# Altium PCB Base.PcbDoc
Units mm, origin at the board's own origin, x right, y up, seen from the top; angles counter-clockwise.
Board outline 79.4 x 68 mm, 4 copper layers (Top Layer, Plane 1, Plane 2, Bottom Layer), stack 1.579 mm thick; 95 components, 41 nets, 267 pads, 201 vias.
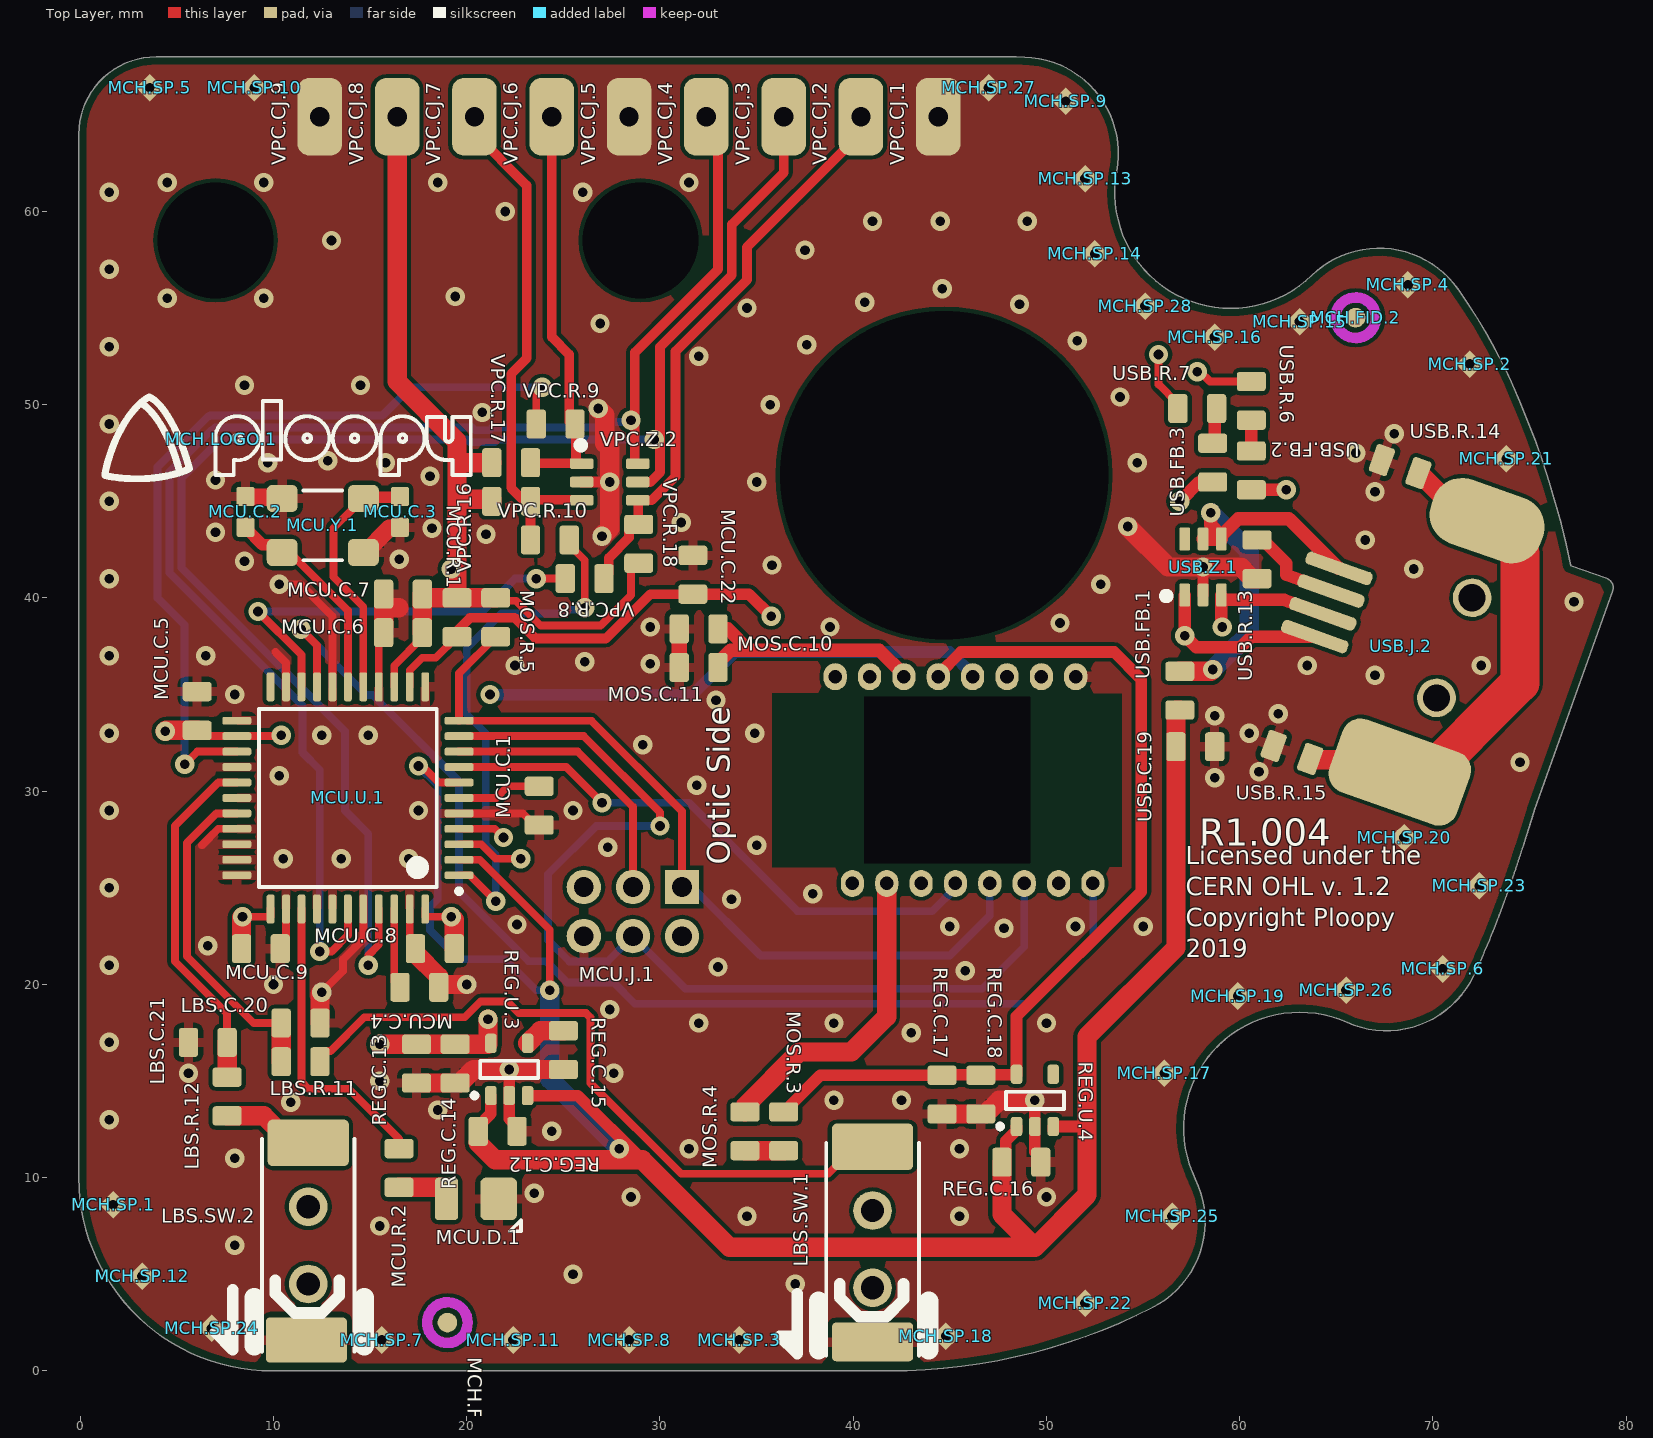
[diagram p0: Top Layer view]
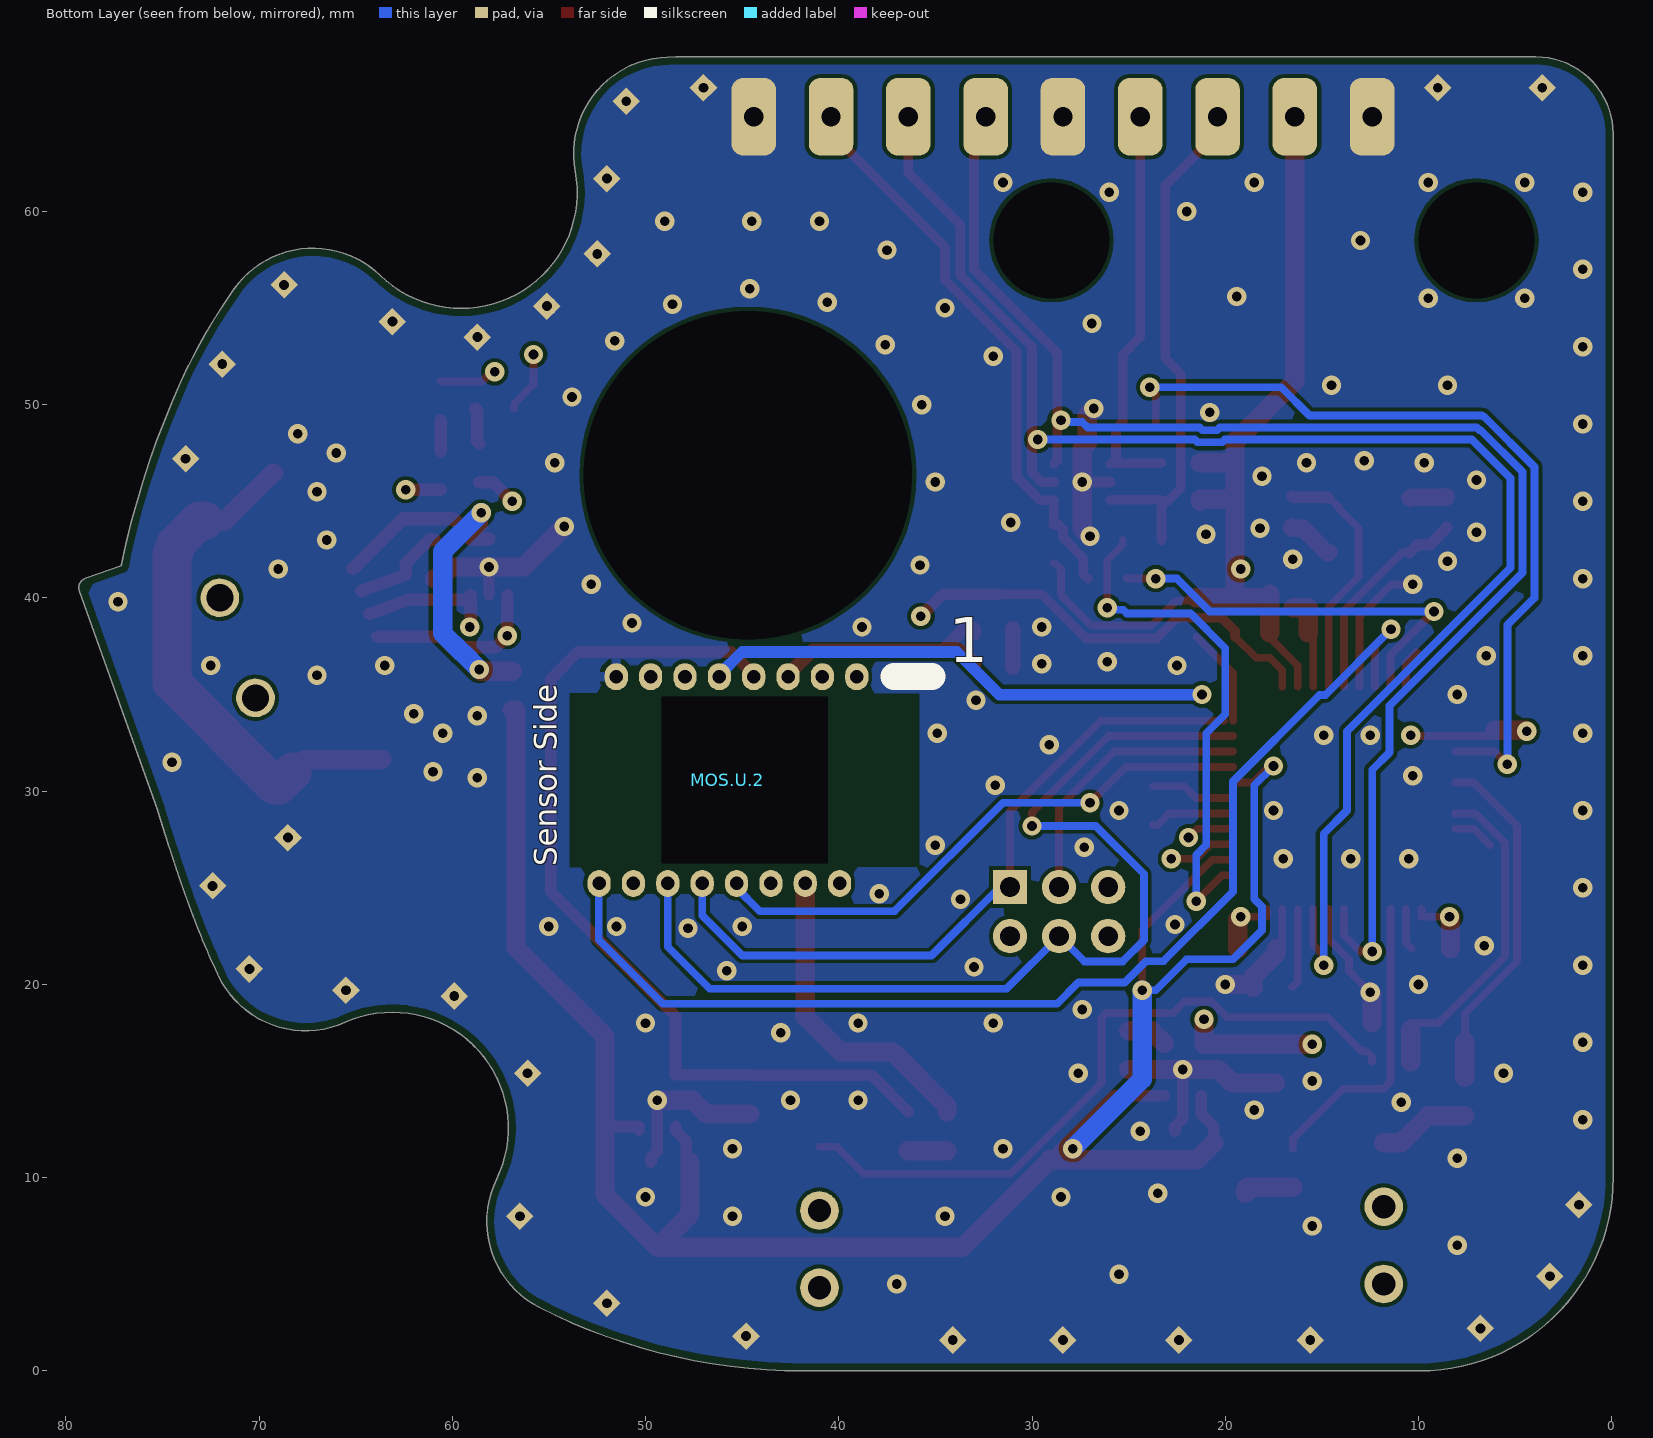
[diagram p1: Bottom Layer view, seen from below]
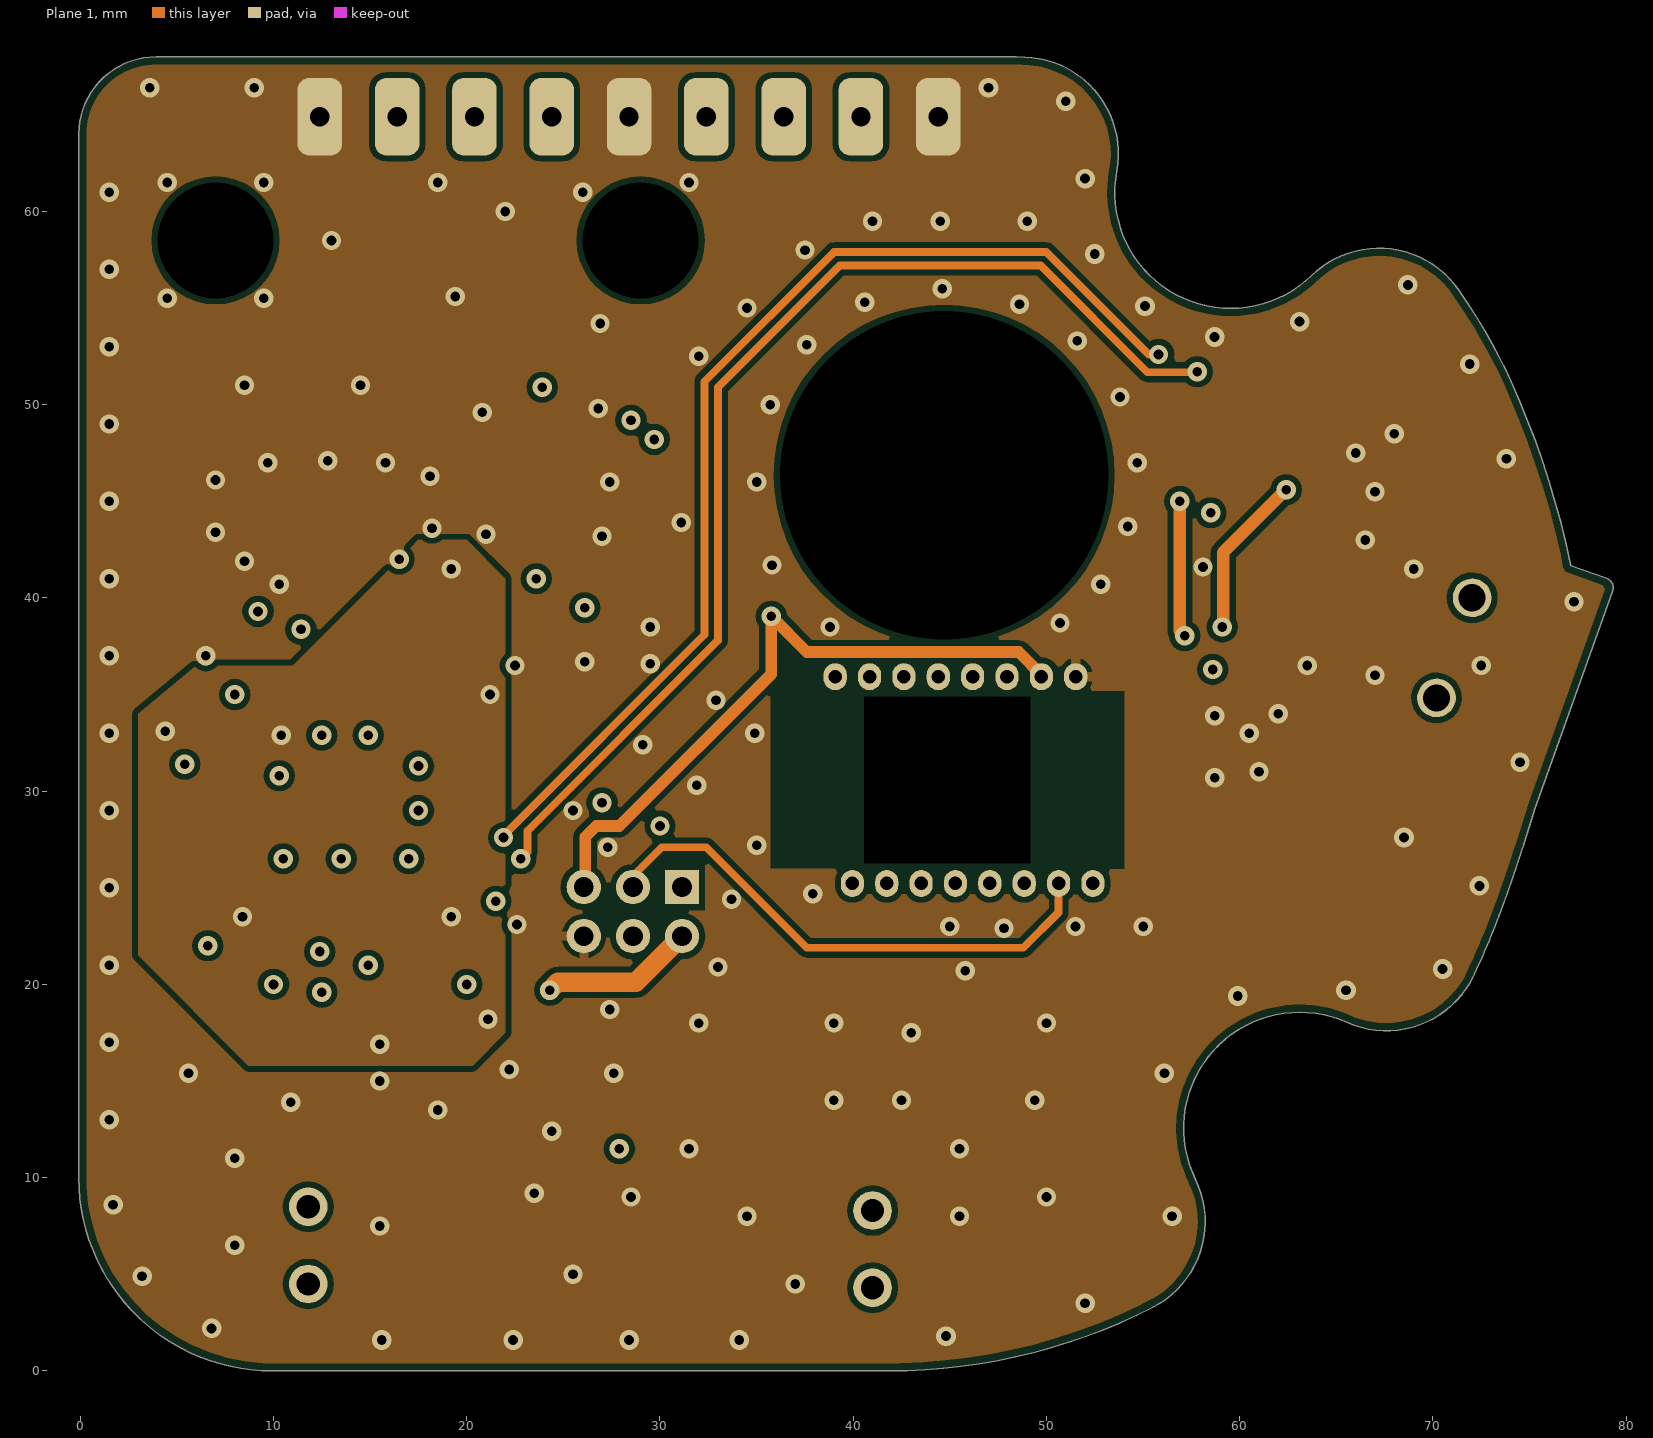
[diagram p2: Plane 1]
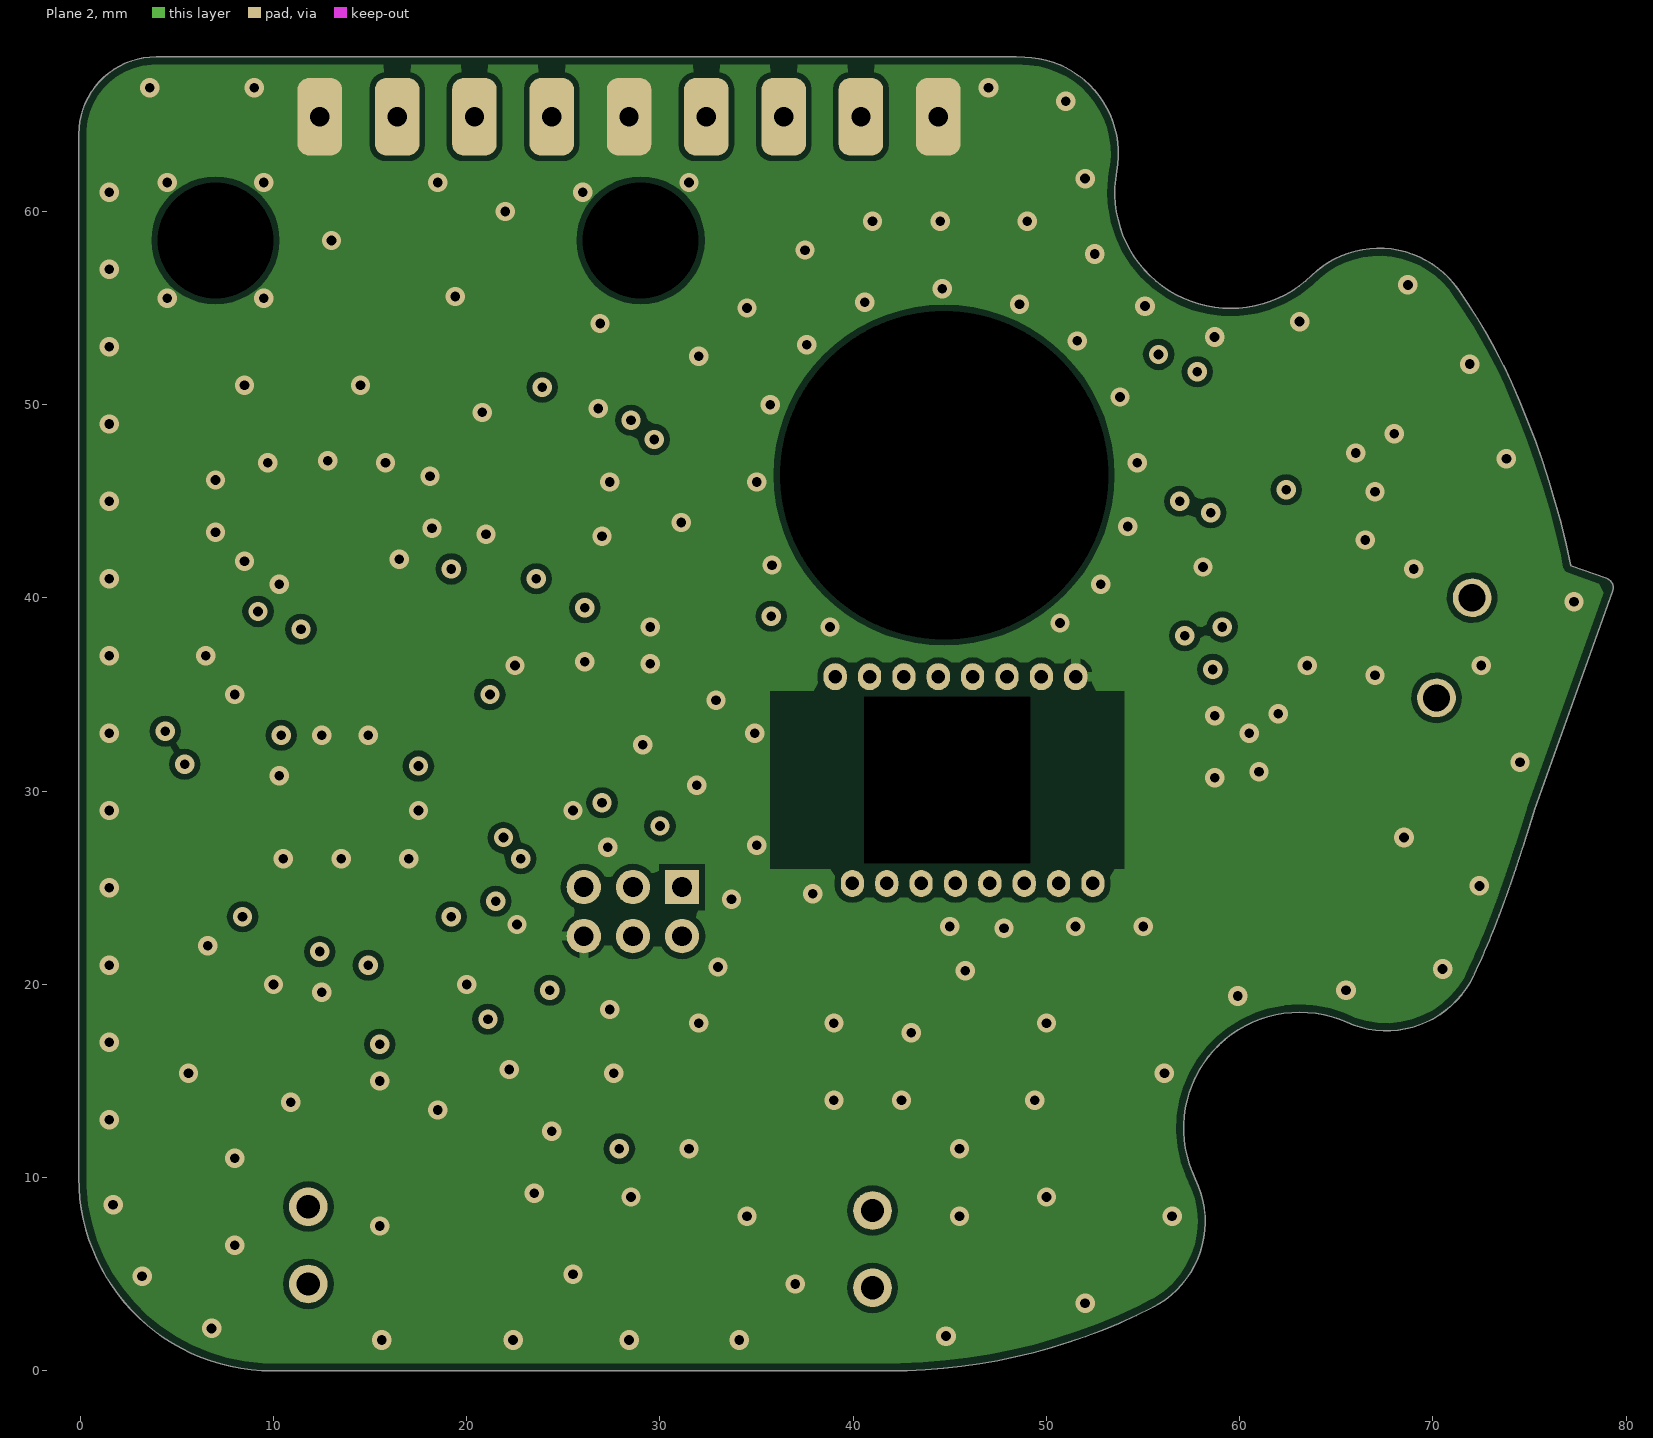
[diagram p3: Plane 2]

## Layer stack, top to bottom
Top Mask: solder mask 0.01, Solder Resist, Dk 3.5
Top Layer: signal copper 0.0356
Dielectric 1: prepreg 0.127, FR-4, Dk 4.2
Plane 1: signal copper 0.036
Dielectric 4: core 1.182, Dk 4.2
Plane 2: signal copper 0.036
Dielectric 2: prepreg 0.127, Dk 4.2
Bottom Layer: signal copper 0.0356
Bottom Solder: solder mask 0.01, Solder Resist, Dk 3.5

## Board outline
364 vertices, not listed, extent -0.073,0 79.324,68

## Design rules (kind name [scope] priority, off if disabled: settings)
BoardOutlineClearance [(Not HasFootprint('SPARKGAP'))] p1: gap=0.4 ignorepadtopadclearanceinfootprint=FALSE
Clearance "HighV Pads" [(InNetClass('HighV') AND (IsPad OR IsVia)) vs IsPad OR IsVia] p1: gap=0.4 ignorepadtopadclearanceinfootprint=FALSE except(0: Arc-Hole Track-Hole SMDPad-Hole THPad-Hole Via-Hole Fill-Hole Poly-Hole Region-Hole Text-Hole) // Establishes minimum clearance between bare pads that are high voltage, per IPC2221A Table 6-1, 51-100V, condition A6
Clearance Inter-Pad [IsPad vs IsPad] p2: gap=0.2 ignorepadtopadclearanceinfootprint=FALSE except(0: Arc-Hole Track-Hole SMDPad-Hole THPad-Hole Via-Hole Fill-Hole Poly-Hole Region-Hole Text-Hole)
Clearance "Spark Gaps" [InNetClass('Spark Gap') vs InNet('GND') And InPoly] p3: gap=0.635 ignorepadtopadclearanceinfootprint=FALSE except(0: Arc-Hole Track-Hole SMDPad-Hole THPad-Hole Via-Hole Fill-Hole Poly-Hole Region-Hole Text-Hole)
Clearance FIDs [Name like 'FID*'] p4: gap=1.016 ignorepadtopadclearanceinfootprint=FALSE except(0: Arc-Hole Track-Hole SMDPad-Hole THPad-Hole Via-Hole Fill-Hole Poly-Hole Region-Hole Text-Hole)
Clearance "Inner Planes" [InPoly AND OnMid] p5: gap=0.3 ignorepadtopadclearanceinfootprint=FALSE except(0: Arc-Hole Track-Hole SMDPad-Hole THPad-Hole Via-Hole Fill-Hole Poly-Hole Region-Hole Text-Hole) // Defines a larger clearance for planes on inner layers.
Clearance "All Planes" [InPoly] p6: gap=0.2 ignorepadtopadclearanceinfootprint=FALSE except(0: Arc-Hole Track-Hole SMDPad-Hole THPad-Hole Via-Hole Fill-Hole Poly-Hole Region-Hole Text-Hole) // Defines minimum clearance between planes on the same layer.
Clearance "Inner Layer Clearance" [OnMid vs OnMid] p7: gap=0.3 ignorepadtopadclearanceinfootprint=FALSE except(0: Arc-Hole Track-Hole SMDPad-Hole THPad-Hole Via-Hole Fill-Hole Poly-Hole Region-Hole Text-Hole) // We will give inner layers more spacing because they tend to be subject to stricter process limits.
Clearance [All] p8: gap=0.22 ignorepadtopadclearanceinfootprint=FALSE except(0: Arc-Hole Track-Hole SMDPad-Hole THPad-Hole Via-Hole Fill-Hole Poly-Hole Region-Hole Text-Hole) // 2 oz (70um) boards require at least 10mil spacing. We give a bit more to make sure things work well.
ComponentClearance "Terminal Block" [(HasFootprint('Phoenix 1933189 - Header')) vs (HasFootprint('Phoenix 1933189 - Header'))] p1: gap=-2.286 collisioncheckmode=3 verticalgap=0.254 showdistances=FALSE
ComponentClearance "FET/TP self Clearance" [(Name like 'Q*') Or (Name like 'TP*') vs (Name like 'Q*') Or (Name like 'TP*')] p2: gap=0.254 collisioncheckmode=3 verticalgap=0.254 showdistances=FALSE
ComponentClearance [Not ((Name like 'H*') Or (Name like 'FID*') Or (Name like 'SP*')) vs Not ((Name like 'H*') Or (Name like 'FID*') Or (Name like 'SP*'))] p3: gap=0.5 collisioncheckmode=3 verticalgap=0.5 showdistances=FALSE
DiffPairsRouting [All] p1: maxlimit=0.508 minlimit=0.279 mostfreqgap=0.381 toplayer_prefgap=0.279 toplayer_minwidth=0.279 toplayer_maxwidth=0.508 toplayer_prefwidth=0.381 midlayer2_mingap=0.305 midlayer2_minwidth=0.305 midlayer2_maxwidth=0.508 midlayer2_prefwidth=0.381 midlayer3_prefgap=0.279 midlayer3_minwidth=0.279 midlayer3_maxwidth=0.508 midlayer3_prefwidth=0.381 bottomlayer_prefgap=0.279 bottomlayer_minwidth=0.279 bottomlayer_maxwidth=0.508 bottomlayer_prefwidth=0.381 maxuncoupledlength=12.7
Height [All] p1: minheight=0 maxheight=41 prefheight=12.7
HoleSize [All] p1: absolutevalues=TRUE maxlimit=100 minlimit=0.3 maxpercent=80.000 minpercent=20.000
HoleToHoleClearance [All] p1: gap=0.6 allowstackedmicrovias=TRUE
LayerPairs [All] p1: enforce=FALSE
MinimumSolderMaskSliver [All] p1: minsoldermaskwidth=0.09
NetAntennae [Not (HasFootprint('BALANCE_RESISTOR'))] p1: netantennaetolerance=0
PasteMaskExpansion [All] p1: expansion=-0.025
PlaneClearance [All] p1: clearance=0.3
PlaneConnect [All] p1: pad.planeconnectstyle=Relief pad.reliefexpansion=0.5 pad.reliefentries=4 pad.reliefconductorwidth=0.5 pad.reliefairgap=0.25 via.planeconnectstyle=Direct via.reliefexpansion=0.5 via.reliefentries=4 via.reliefconductorwidth=0.5 via.reliefairgap=0.25
PolygonConnect "PolygonConnect Spark Gap" [HasFootprint('SparkGap')] p1: connectstyle=Direct reliefconductorwidth=0.254 reliefentries=4 polygonreliefangle="90 Angle" airgapwidth=0.254 // This rule makes it so spark gaps get direct connections to ground planes.
PolygonConnect PolygonConnect_GND [All vs InNet('GND')] p2: thpad.connectstyle=Relief thpad.reliefconductorwidth=0.5 thpad.reliefentries=4 thpad.polygonreliefangle="90 Angle" thpad.airgapwidth=0.25 smdpad.connectstyle=Relief smdpad.reliefconductorwidth=0.5 smdpad.reliefentries=4 smdpad.polygonreliefangle="90 Angle" smdpad.airgapwidth=0.25 via.connectstyle=Direct via.reliefconductorwidth=0.5 via.reliefentries=4 via.polygonreliefangle="90 Angle" via.airgapwidth=0.25 // This rule specifies all vias and holes connected to a GND plane have direct connections.
PolygonConnect [All] p3: thpad.connectstyle=Relief thpad.reliefconductorwidth=0.5 thpad.reliefentries=4 thpad.polygonreliefangle="90 Angle" thpad.airgapwidth=0.25 smdpad.connectstyle=Relief smdpad.reliefconductorwidth=0.5 smdpad.reliefentries=4 smdpad.polygonreliefangle="90 Angle" smdpad.airgapwidth=0.25 via.connectstyle=Direct via.reliefconductorwidth=0.5 via.reliefentries=4 via.polygonreliefangle="90 Angle" via.airgapwidth=0.25
RoutingVias [All] p1: holewidth=0.5 width=1 viastyle="Through Hole" minholewidth=0.2 minwidth=0.5 maxholewidth=5.08 maxwidth=6.35
ShortCircuit [Not (InPadClass('TraceResistorPads')) vs Not (InPadClass('TraceResistorPads'))] p1: allowed=FALSE
SilkToBoardRegionClearance [All] p1 off:
SilkToSilkClearance [All] p1 off: silktosilkclearance=0.254
SilkToSolderMaskClearance SilkscreenOverComponentPads [IsPad] p1: minsilkscreentomaskgap=0.102 clearancetoexposedcopper=FALSE
SolderMaskExpansion [All] p1: expansion=0.076
Width [All] p1: maxlimit=50.8 minlimit=0.26 preferedwidth=0.4 midlayer2_minwidth=0.35 midlayer3_minwidth=0.35 minimp=50.000000 maximp=50.000000 favimp=50.000000
15 further rules are at their usual default settings.

## Classes and differential pairs
component class VPC: VPC.CJ.1 VPC.CJ.2 VPC.CJ.3 VPC.CJ.4 VPC.CJ.5 VPC.CJ.6 VPC.CJ.7 VPC.CJ.8 VPC.CJ.9 VPC.R.8 VPC.R.9 VPC.R.10 VPC.R.16 VPC.R.17 VPC.R.18 VPC.Z.2
component class USB: USB.C.19 USB.FB.1 USB.FB.2 USB.FB.3 USB.J.2 USB.R.6 USB.R.7 USB.R.13 USB.R.14 USB.R.15 USB.Z.1
component class REG: REG.C.12 REG.C.13 REG.C.14 REG.C.15 REG.C.16 REG.C.17 REG.C.18 REG.U.3 REG.U.4
component class MOS: MOS.C.10 MOS.C.11 MOS.R.3 MOS.R.4 MOS.R.5 MOS.U.2
component class MCU: MCU.C.1 MCU.C.2 MCU.C.3 MCU.C.4 MCU.C.5 MCU.C.6 MCU.C.7 MCU.C.8 MCU.C.9 MCU.C.22 MCU.D.1 MCU.J.1 MCU.R.1 MCU.R.2 MCU.U.1 MCU.Y.1
component class LBS: LBS.C.20 LBS.C.21 LBS.R.11 LBS.R.12 LBS.SW.1 LBS.SW.2
component class MCH: MCH.FID.1 MCH.FID.2 MCH.LOGO.1 MCH.SP.1 MCH.SP.2 MCH.SP.3 MCH.SP.4 MCH.SP.5 MCH.SP.6 MCH.SP.7 MCH.SP.8 MCH.SP.9 MCH.SP.10 MCH.SP.11 MCH.SP.12 MCH.SP.13 MCH.SP.14 MCH.SP.15 MCH.SP.16 MCH.SP.17 MCH.SP.18 MCH.SP.19 MCH.SP.20 MCH.SP.21 MCH.SP.22 MCH.SP.23 MCH.SP.24 MCH.SP.25 MCH.SP.26 MCH.SP.27 MCH.SP.28

## Components (designator, comment, footprint, x,y, rotation, side; value= is the part's Value field where it differs from the comment)
LBS.C.20 "0805" 0805 11.4,18 r270 top value="0.01uF 100V" (schematic designator C20)
LBS.C.21 "0805" 0805 6.6,17 r90 top value="0.01uF 100V" (schematic designator C21)
LBS.R.11 "0805" 0805 11.4,16 r270 top value="1k 1%" (schematic designator R11)
LBS.R.12 "0805" 0805 7.6,14.2 r180 top value="1k 1%" (schematic designator R12)
LBS.SW.1 "D2LS-21" D2LS-21#1 41,6.3 r90 top (schematic designator SW1)
LBS.SW.2 "D2LS-21" D2LS-21#2 11.8,6.5 r90 top (schematic designator SW2)
MCH.FID.1 "IPC-7351 Fiducial 1mm" FIDUCIAL_1.5 19,2.5 r0 top (schematic designator FID1)
MCH.FID.2 "IPC-7351 Fiducial 1mm" FIDUCIAL_1.5 66,54.5 r0 top (schematic designator FID2)
MCH.LOGO.1 "Ploopy logo, silkscreen" PloopyLogo 7.3,48.2 r0 top (schematic designator LOGO1)
MCH.SP.1 "Spark Gap" SparkGap 1.7,8.6 r90 top (schematic designator SP1)
MCH.SP.2 "Spark Gap" SparkGap 71.9,52.1 r90 top (schematic designator SP2)
MCH.SP.3 "Spark Gap" SparkGap 34.1,1.6 r90 top (schematic designator SP3)
MCH.SP.4 "Spark Gap" SparkGap 68.7,56.2 r90 top (schematic designator SP4)
MCH.SP.5 "Spark Gap" SparkGap 3.6,66.4 r90 top (schematic designator SP5)
MCH.SP.6 "Spark Gap" SparkGap 70.5,20.8 r90 top (schematic designator SP6)
MCH.SP.7 "Spark Gap" SparkGap 15.6,1.6 r90 top (schematic designator SP7)
MCH.SP.8 "Spark Gap" SparkGap 28.4,1.6 r90 top (schematic designator SP8)
MCH.SP.9 "Spark Gap" SparkGap 51,65.7 r90 top (schematic designator SP9)
MCH.SP.10 "Spark Gap" SparkGap 9,66.4 r90 top (schematic designator SP10)
MCH.SP.11 "Spark Gap" SparkGap 22.4,1.6 r90 top (schematic designator SP11)
MCH.SP.12 "Spark Gap" SparkGap 3.2,4.9 r90 top (schematic designator SP12)
MCH.SP.13 "Spark Gap" SparkGap 52,61.7 r90 top (schematic designator SP13)
MCH.SP.14 "Spark Gap" SparkGap 52.5,57.8 r90 top (schematic designator SP14)
MCH.SP.15 "Spark Gap" SparkGap 63.1,54.3 r90 top (schematic designator SP15)
MCH.SP.16 "Spark Gap" SparkGap 58.7,53.5 r90 top (schematic designator SP16)
MCH.SP.17 "Spark Gap" SparkGap 56.1,15.4 r90 top (schematic designator SP17)
MCH.SP.18 "Spark Gap" SparkGap 44.8,1.8 r90 top (schematic designator SP18)
MCH.SP.19 "Spark Gap" SparkGap 59.9,19.4 r90 top (schematic designator SP19)
MCH.SP.20 "Spark Gap" SparkGap 68.5,27.6 r90 top (schematic designator SP20)
MCH.SP.21 "Spark Gap" SparkGap 73.8,47.2 r90 top (schematic designator SP21)
MCH.SP.22 "Spark Gap" SparkGap 52,3.5 r90 top (schematic designator SP22)
MCH.SP.23 "Spark Gap" SparkGap 72.4,25.1 r90 top (schematic designator SP23)
MCH.SP.24 "Spark Gap" SparkGap 6.8,2.2 r90 top (schematic designator SP24)
MCH.SP.25 "Spark Gap" SparkGap 56.5,8 r90 top (schematic designator SP25)
MCH.SP.26 "Spark Gap" SparkGap 65.5,19.7 r90 top (schematic designator SP26)
MCH.SP.27 "Spark Gap" SparkGap 47,66.4 r90 top (schematic designator SP27)
MCH.SP.28 "Spark Gap" SparkGap 55.1,55.1 r90 top (schematic designator SP28)
MCU.C.1 "0805" 0805 23.75,29.25 r180 top value="1uF 25V" (schematic designator C1)
MCU.C.2 "0603" 0603 8.55,44.45 r180 top value="18pF 50V" (schematic designator C2)
MCU.C.3 "0603" 0603 16.55,44.45 r0 top value="18pF 50V" (schematic designator C3)
MCU.C.4 "0805" 0805 17.55,19.85 r270 top value="0.1uF 100V" (schematic designator C4)
MCU.C.5 "0805" 0805 6.05,34.15 r0 top value="0.1uF 100V" (schematic designator C5)
MCU.C.6 "0805" 0805 16.7,38.2 r90 top value="0.1uF 100V" (schematic designator C6)
MCU.C.7 "0805" 0805 16.7,40.2 r90 top value="10uF 25V" (schematic designator C7)
MCU.C.8 "0805" 0805 18.35,21.85 r90 top value="0.1uF 100V" (schematic designator C8)
MCU.C.9 "0805" 0805 9.35,21.85 r270 top value="0.1uF 100V" (schematic designator C9)
MCU.C.22 "0805" 0805 31.7,41.2 r0 top value="0.1uF 100V" (schematic designator C22)
MCU.D.1 "SPMWH1228" SPMWH1228 20.5,8.9 r0 top (schematic designator D1)
MCU.J.1 "Atmel_ICSP" 6x2 31.14,25.04 r270 top (schematic designator J1)
MCU.R.1 "0805" 0805 19.5,39 r180 top value="10k 1%" (schematic designator R1)
MCU.R.2 "0805" 0805 16.5,10.5 r180 top value="1k 1%" (schematic designator R2)
MCU.U.1 "ATMEGA32U4RC-AU" "ATmega32U4 - TQFP80P1200X1200X120-44N" 13.85,29.65 r180 top locked (schematic designator U1)
MCU.Y.1 "LFXTAL055663BULK" LFXTAL055663BULK 12.55,43.75 r180 top (schematic designator Y1)
MOS.C.10 "0805" 0805 32,38.4 r90 top value="10uF 25V" (schematic designator C10)
MOS.C.11 "0805" 0805 32,36.4 r90 top value="0.1uF 100V" (schematic designator C11)
MOS.R.3 "0805" 0805 36.4,12.4 r180 top value="22R 1%" (schematic designator R3)
MOS.R.4 "0805" 0805 34.4,12.4 r0 top value="22R 1%" (schematic designator R4)
MOS.R.5 "0805" 0805 21.5,39 r180 top value="10k 1%" (schematic designator R5)
MOS.U.2 "PMW3360DM-T2QU" PMW3360DM-T2QU 39.067,35.925 r180 bottom locked (schematic designator U2)
REG.C.12 "0805" 0805 21.6,12.4 r270 top value="1uF 25V" (schematic designator C12)
REG.C.13 "0805" 0805 17.4,15.9 r180 top value="10uF 25V" (schematic designator C13)
REG.C.14 "0805" 0805 19.4,15.9 r180 top value="1uF 25V" (schematic designator C14)
REG.C.15 "0805" 0805 25,16.6 r180 top value="100pF 100V" (schematic designator C15)
REG.C.16 "0805" 0805 48.7,10.8 r270 top locked value="1uF 25V" (schematic designator C16)
REG.C.17 "0805" 0805 44.6,14.3 r180 top value="10uF 25V" (schematic designator C17)
REG.C.18 "0805" 0805 46.6,14.3 r180 top value="1uF 25V" (schematic designator C18)
REG.U.3 "AP2202K-3.3" "AP2202 - SOT95P270X145-5N" 22.2,15.6 r90 top (schematic designator U3)
REG.U.4 "AP2204K-1.8" "AP2202 - SOT95P270X145-5N" 49.4,14 r90 top (schematic designator U4)
USB.C.19 "0805" 0805 57.7,32.3 r270 top value="10uF 25V" (schematic designator C19)
USB.FB.1 "ACML-0805-601-T" 0805 56.9,35.2 r0 top (schematic designator FB1)
USB.FB.2 "ACML-0805-601-T" 0805 60.6,46.6 r180 top (schematic designator FB2)
USB.FB.3 "ACML-0805-601-T" 0805 58.6,47 r180 top (schematic designator FB3)
USB.J.2 "1734346-4" 1734346-4 71.575,37.25 r340.4 top locked (schematic designator J2)
USB.R.6 "0805" 0805 60.6,50.2 r180 top value="22R 1%" (schematic designator R6)
USB.R.7 "0805" 0805 57.8,49.8 r270 top value="22R 1%" (schematic designator R7)
USB.R.13 "0805" 0805 60.9,42 r180 top value=0R (schematic designator R13)
USB.R.14 "0805" 0805 68.3,46.8 r70.4 top value=0R (schematic designator R14)
USB.R.15 "0805" 0805 62.7,32 r70.4 top value=0R (schematic designator R15)
USB.Z.1 "IP4220CZ6,125" "PESD3V3S4UD - SOT95P275X110-6N" 58.1,41.6 r90 top (schematic designator Z1)
VPC.CJ.1 "PCBJointCastellationJoint" PCBJoint 44.4,64.9 r0 top (schematic designator CJ1)
VPC.CJ.2 "PCBJointCastellationJoint" PCBJoint 40.4,64.9 r0 top (schematic designator CJ2)
VPC.CJ.3 "PCBJointCastellationJoint" PCBJoint 36.4,64.9 r0 top (schematic designator CJ3)
VPC.CJ.4 "PCBJointCastellationJoint" PCBJoint 32.4,64.9 r0 top (schematic designator CJ4)
VPC.CJ.5 "PCBJointCastellationJoint" PCBJoint 28.4,64.9 r0 top (schematic designator CJ5)
VPC.CJ.6 "PCBJointCastellationJoint" PCBJoint 24.4,64.9 r0 top (schematic designator CJ6)
VPC.CJ.7 "PCBJointCastellationJoint" PCBJoint 20.4,64.9 r0 top (schematic designator CJ7)
VPC.CJ.8 "PCBJointCastellationJoint" PCBJoint 16.4,64.9 r0 top (schematic designator CJ8)
VPC.CJ.9 "PCBJointCastellationJoint" PCBJoint 12.4,64.9 r0 top (schematic designator CJ9)
VPC.R.8 "0805" 0805 26.1,41 r270 top value="10k 1%" (schematic designator R8)
VPC.R.9 "0805" 0805 24.6,49 r270 top value="10k 1%" (schematic designator R9)
VPC.R.10 "0805" 0805 24.3,43 r90 top value="10k 1%" (schematic designator R10)
VPC.R.16 "0805" 0805 22.3,45 r270 top value="1k 1%" (schematic designator R16)
VPC.R.17 "0805" 0805 22.3,47 r270 top value="1k 1%" (schematic designator R17)
VPC.R.18 "0805" 0805 28.9,42.8 r0 top value="1k 1%" (schematic designator R18)
VPC.Z.2 "IP4220CZ6,125" "PESD3V3S4UD - SOT95P275X110-6N" 27.4,46 r0 top (schematic designator Z2)

## Footprints (in the part's own frame and the unit in brackets; to place one, negate y for a bottom-side part, rotate by r counter-clockwise, add the part's x,y. Pads: shape width x height; smd on the part's side, far side on the other; paste and mask are expansions set on the pad)
6x2 [mil]
  rect 70x70 hole 40 paste-3897.64: 1(0,0)
  round 70 hole 40 paste-3897.64: 2(100,0) 3(0,-100) 4(100,-100) 5(0,-200) 6(100,-200)
  body extent -50,-250 150,50, height 330
0603 [mm] "Chip Capacitor, 2-Leads, Body 1.6x0.8mm, IPC Medium Density"
  rrect30% 0.95x1 smd paste-2.515: 1(0,-0.8) 2(0,0.8)
  body extent -0.48,-0.88 0.48,0.87, height 0.65
0805 [mm] "Chip Capacitor, 2-Leads, Body 2.0x1.3mm, IPC Medium Density"
  rrect30% 1.5x1 smd paste-2.515: 1(0,1.002) 2(0,-1.002)
  body extent -0.72,-1.1 0.72,1.1, height 0.8
1734346-4 [mm]
  rrect70% 3.6x0.7 smd paste-0.08 mask+0.092: 1(-7.5,1.875) 2(-7.5,-0.625) 3(-7.5,-1.875) 4(-7.5,0.625)
  rrect90% 6x3.5 smd paste-0.4: 5(-1.11,6.77)
  rrect50% 7x4 smd paste-0.4: 5(-1,-7)
  round 2 hole 1.4 paste-99: ""(-0.5,2.75) ""(-0.5,-2.75)
  body extent -8.6,-8.25 8.5,8.25, height 11.31
"AP2202 - SOT95P270X145-5N" [mm] "SOT23, 5-Leads, Body 2.92x2.70mm, Pitch 0.95mm, IPC Medium Density"
  rrect50% 1x0.6 smd paste-0.025: 1(-1.35,0.95) 2(-1.35,0) 3(-1.35,-0.95) 4(1.35,-0.95) 5(1.35,0.95)
  silkscreen extent -1.47,-1.5 0.45,1.92, body extent -0.85,-1.52 0.85,1.52, height 1.45
"ATmega32U4 - TQFP80P1200X1200X120-44N" [mm] "TQFP, 44-Leads, Body 10.00x10.00mm, Pitch 0.80mm, IPC Medium Density"
  rrect50% 1.5x0.4 smd paste-0.05: 1(-5.75,4) 2(-5.75,3.2) 3(-5.75,2.4) 4(-5.75,1.6) 5(-5.75,0.8) 6(-5.75,0) 7(-5.75,-0.8) 8(-5.75,-1.6) 9(-5.75,-2.4) 10(-5.75,-3.2) 11(-5.75,-4) 23(5.75,-4) 24(5.75,-3.2) 25(5.75,-2.4) 26(5.75,-1.6) 27(5.75,-0.8) 28(5.75,0) 29(5.75,0.8) 30(5.75,1.6) 31(5.75,2.4) 32(5.75,3.2) 33(5.75,4)
  rrect50% 0.4x1.5 smd paste-0.05: 12(-4,-5.75) 13(-3.2,-5.75) 14(-2.4,-5.75) 15(-1.6,-5.75) 16(-0.8,-5.75) 17(0,-5.75) 18(0.8,-5.75) 19(1.6,-5.75) 20(2.4,-5.75) 21(3.2,-5.75) 22(4,-5.75) 34(4,5.75) 35(3.2,5.75) 36(2.4,5.75) 37(1.6,5.75) 38(0.8,5.75) 39(0,5.75) 40(-0.8,5.75) 41(-1.6,5.75) 42(-2.4,5.75) 43(-3.2,5.75) 44(-4,5.75)
  silkscreen extent -5.88,-4.6 4.6,4.95, body extent -5,-5 5,5, height 1.2
D2LS-21#1 [mm]
  rrect20% 2x4.2 smd paste-0.03: A(-4.8,0)
  rrect20% 2.4x4.2 smd paste-0.03: B(5.3,0)
  round 2 hole 1.2: ""(-2,0) ""(2,0)
  silkscreen extent -5.5,-2.9 5.5,4.8, body extent -5.6,-2.4 5.6,2.4, height 3.19
D2LS-21#2 [mm]
  rrect20% 2.35x4.2 smd paste-0.03: A(-4.9,0.1)
  rrect20% 2.4x4.2 smd paste-0.03: B(5.3,0)
  round 2 hole 1.2: ""(-2,0) ""(2,0)
  silkscreen extent -5.5,-2.9 5.5,4.8, body extent -5.6,-2.4 5.6,2.4, height 3.19
FIDUCIAL_1.5 [mil]
  round 40 smd paste-60 mask+30: 1(0,0)
  Top Layer keep-out circle w21.65: c0,0 r41.34
LFXTAL055663BULK [mm]
  rrect40% 1.6x1.4 smd paste-0.05: 1(-2.1,-1.4) 2(2.1,-1.4) 3(2.1,1.4) 4(-2.1,1.4)
  silkscreen extent -1,-1.8 1,1.8, body extent -2.5,-1.6 2.5,1.6, height 1
PCBJoint [mm]
  rrect50% 2.3x4 hole 1 paste-99: 1(0,0)
"PESD3V3S4UD - SOT95P275X110-6N" [mm] "SOT23, 6-Leads, Body 2.90x2.75mm, Pitch 0.95mm, IPC Medium Density"
  rrect30% 1.2x0.55 smd paste-0.026 mask+0.085: 1(-1.45,0.95) 2(-1.45,0) 3(-1.45,-0.95) 4(1.45,-0.95) 5(1.45,0) 6(1.45,0.95)
  silkscreen extent -1.62,1.77 -1.38,2.02, body extent -0.85,-1.55 0.85,1.55, height 1.1
PloopyLogo [mm]
  silkscreen extent -6.04,-2.03 12.9,2.2
PMW3360DM-T2QU [mm]
  oval 1.2x1.4 hole 0.7: 1(0,0) 2(-1.778,0) 3(-3.556,0) 4(-5.334,0) 5(-7.112,0) 6(-8.89,0) 7(-10.668,0) 8(-12.446,0) 9(-13.335,-10.7) 10(-11.557,-10.7) 11(-9.779,-10.7) 12(-8.001,-10.7) 13(-6.223,-10.7) 14(-4.445,-10.7) 15(-2.667,-10.7) 16(-0.889,-10.7)
  rect 0x0 hole 8.6 square unplated: ""(-5.8,-5.35)
  silkscreen extent 1.92,0 3.9,0, body extent -16.06,-14.76 5.09,4.09, height 2.44
SparkGap [mil]
  rect 40x40 smd rot 45 paste-99 mask+4: 1(0,0)
  rect 40x40 smd far side rot 45 paste-99 mask+4: 1(0,0)
SPMWH1228 [mm]
  rrect30% 1.2x2.2 smd paste-0.05 mask+0.02: 1(-1.55,0)
  rrect30% 1.9x2.2 smd paste-0.05 mask+0.02: 2(1.15,0)
  silkscreen extent 1.72,-1.67 2.3,-1.1, body extent -1.75,-1.4 1.75,1.4, height 0.65

## Part data
LBS.C.20 LBS.C.21: library part "Cap 0.01uF 100V", "0805, X5R or better", Supplier Part Number 1=1276-6845-2-ND, PNP-A=0, PNP-da=0, PNP-dx=0, PNP-dy=0, PNP-FeedType=Tape, PNP-Level=1, PNP-Lv=1, PNP-Nzl=2, PNP-PlacePriority=1, PNP-Pt=0, PNP-TapeIndex=1, PNP-TapeWidth=8, PNP-Thk=0.85, PNP-TS=70, PNP-Type=chi, PNP-Voff=0, PNP-W=0, PNP-X=2.00, PNP-Y=1.25, Supplier 1=Digi-Key, Supplier 2=Arrow, Supplier Part Number 2=HFLC7Kmwq4-6R2SVzaQAUvCwxvZH1YjWdj_EBba1ByE
LBS.R.11 LBS.R.12 MCU.R.2 VPC.R.16 VPC.R.17 VPC.R.18: library part "Res 1k 1% 0805", "Chip resistor, 1/8W 100PPM", Supplier Part Number 1=RMCF0805FT1K00TR-ND, PNP-A=0, PNP-da=0, PNP-dx=0, PNP-dy=0, PNP-FeedType=Tape, PNP-Level=1, PNP-Lv=1, PNP-Nzl=2, PNP-PlacePriority=1, PNP-Pt=0, PNP-TapeIndex=1, PNP-TapeWidth=8, PNP-Thk=0.55, PNP-TS=70, PNP-Type=chi, PNP-Voff=0, PNP-W=0, PNP-X=2.00, PNP-Y=1.25, Supplier 1=Digi-Key
LBS.SW.1 LBS.SW.2: "Compact Surface-mounting Switch for long durability", Supplier Part Number 1=Z4378CT-ND, Supplier 1=Digi-Key, Supplier 2=Mouser, Supplier Part Number 2=653-D2LS-21
MCH.FID.1 MCH.FID.2: library part FIDUCIAL_1.5, PNP-A=1, PNP-da=0, PNP-dx=0, PNP-dy=0, PNP-FeedType=Fiducial, PNP-Level=1, PNP-Lv=1, PNP-Nzl=2, PNP-PlacePriority=0, PNP-Pt=0, PNP-TapeIndex=0, PNP-TapeWidth=0, PNP-Thk=1.02, PNP-TS=70, PNP-Type=MARK1, PNP-Voff=0, PNP-W=0, PNP-X=4, PNP-Y=4
MCH.LOGO.1: library part PloopyLogo, PNP-A=0, PNP-da=0, PNP-dx=0, PNP-dy=0, PNP-FeedType=Tape, PNP-Level=1, PNP-Lv=1, PNP-Nzl=2, PNP-PlacePriority=1, PNP-Pt=0, PNP-TapeIndex=1, PNP-TapeWidth=8, PNP-Thk=1, PNP-TS=70, PNP-Type=CHI, PNP-Voff=0, PNP-W=0, PNP-X=1, PNP-Y=1
MCH.SP.1 MCH.SP.2 MCH.SP.3 MCH.SP.4 MCH.SP.5 MCH.SP.6 MCH.SP.7 MCH.SP.8 MCH.SP.9 MCH.SP.10 MCH.SP.11 MCH.SP.12 MCH.SP.13 MCH.SP.14 MCH.SP.15 MCH.SP.16 MCH.SP.17 MCH.SP.18 MCH.SP.19 MCH.SP.20 MCH.SP.21 MCH.SP.22 MCH.SP.23 MCH.SP.24 MCH.SP.25 MCH.SP.26 MCH.SP.27 MCH.SP.28: "Open square pad for spark gapping", PNP-A=0, PNP-da=0, PNP-dx=0, PNP-dy=0, PNP-FeedType=Tape, PNP-Level=1, PNP-Lv=1, PNP-Nzl=2, PNP-PlacePriority=1, PNP-Pt=0, PNP-TapeIndex=1, PNP-TapeWidth=8, PNP-Thk=1, PNP-TS=70, PNP-Type=CHI, PNP-Voff=0, PNP-W=0, PNP-X=1, PNP-Y=1
MCU.C.1 REG.C.12 REG.C.14 REG.C.16 REG.C.18: library part "Cap 1uF 25V", "0805, X5R or better", Supplier Part Number 1=1276-1066-2-ND, PNP-A=0, PNP-da=0, PNP-dx=0, PNP-dy=0, PNP-FeedType=Tape, PNP-Level=1, PNP-Lv=1, PNP-Nzl=2, PNP-PlacePriority=1, PNP-Pt=0, PNP-TapeIndex=1, PNP-TapeWidth=8, PNP-Thk=1.25, PNP-TS=70, PNP-Type=chi, PNP-Voff=0, PNP-W=0, PNP-X=2.00, PNP-Y=1.25, Supplier 1=Digi-Key, Supplier 2=Digi-Key, Supplier Part Number 2=1276-1066-1-ND
MCU.C.2 MCU.C.3: library part "Cap 18pF 50V", "0603, C0G or better", Supplier Part Number 1=1292-1494-1-ND, PNP-A=0, PNP-da=0, PNP-dx=0, PNP-dy=0, PNP-FeedType=Tape, PNP-Level=1, PNP-Lv=1, PNP-Nzl=2, PNP-PlacePriority=1, PNP-Pt=0, PNP-TapeIndex=1, PNP-TapeWidth=8, PNP-Thk=0.60, PNP-TS=70, PNP-Type=chi, PNP-Voff=0, PNP-W=0, PNP-X=2.00, PNP-Y=1.25, Supplier 1=Digi-Key
MCU.C.4 MCU.C.5 MCU.C.6 MCU.C.8 MCU.C.9 MCU.C.22 MOS.C.11: library part "Cap 0.1uF 100V", "0805, X5R or better", Supplier Part Number 1=1276-6840-2-ND, PNP-A=0, PNP-da=0, PNP-dx=0, PNP-dy=0, PNP-FeedType=Tape, PNP-Level=1, PNP-Lv=1, PNP-Nzl=2, PNP-PlacePriority=1, PNP-Pt=0, PNP-TapeIndex=1, PNP-TapeWidth=8, PNP-Thk=1.05, PNP-TS=70, PNP-Type=chi, PNP-Voff=0, PNP-W=0, PNP-X=2.00, PNP-Y=1.25, Supplier 1=Digi-Key
MCU.C.7 MOS.C.10 REG.C.13 REG.C.17 USB.C.19: library part "Cap 10uF 25V", "0805, X5R or better", Supplier Part Number 1=81-GRM21BR61E106KA3L, PNP-A=0, PNP-da=0, PNP-dx=0, PNP-dy=0, PNP-FeedType=Tape, PNP-Level=1, PNP-Lv=1, PNP-Nzl=2, PNP-PlacePriority=1, PNP-Pt=0, PNP-TapeIndex=1, PNP-TapeWidth=8, PNP-Thk=1.25, PNP-TS=70, PNP-Type=chi, PNP-Voff=0, PNP-W=0, PNP-X=2.00, PNP-Y=1.25, Supplier 1=Mouser, Supplier 2=Digi-Key, Supplier Part Number 2=490-5523-1-ND
MCU.D.1: "3V/0.5W white LED, 2.8mm x 3.5mm", PNP-A=90, PNP-da=550, PNP-dx=0, PNP-dy=0, PNP-FeedType=Tape, PNP-Level=1, PNP-Lv=1, PNP-Nzl=3, PNP-PlacePriority=2, PNP-Pt=0, PNP-TapeIndex=1, PNP-TapeWidth=8, PNP-Thk=0.65, PNP-TS=70, PNP-Type=chi, PNP-Voff=0, PNP-W=0, PNP-X=2.8, PNP-Y=3.2, Supplier 1=Arrow, Supplier 2=Digi-Key, Supplier 3=Digi-Key, Supplier Part Number 2=1510-1428-1-ND, Supplier Part Number 3=1510-1429-1-ND
MCU.J.1: "6-pin 0.100\" ICSP header", Supplier Part Number 1=S2012EC-03-ND, PNP-da=0, Supplier 1=Digi-Key
MCU.R.1 MOS.R.5 VPC.R.8 VPC.R.9 VPC.R.10: library part "Res 10k 1% 0805", "Chip resistor", Supplier Part Number 1=RMCF0805FT10K0TR-ND, PNP-A=0, PNP-da=0, PNP-dx=0, PNP-dy=0, PNP-FeedType=Tape, PNP-Level=1, PNP-Lv=1, PNP-Nzl=2, PNP-PlacePriority=1, PNP-Pt=0, PNP-TapeIndex=1, PNP-TapeWidth=8, PNP-Thk=0.55, PNP-TS=70, PNP-Type=chi, PNP-Voff=0, PNP-W=0, PNP-X=2.00, PNP-Y=1.25, Supplier 1=Digi-Key
MCU.U.1: "IC MCU 8BIT 32KB FLASH 44TQFP", Supplier Part Number 1=ATMEGA32U4RC-AU-ND, PNP-A=270, PNP-da=0, PNP-dx=0, PNP-dy=0, PNP-FeedType=Tray, PNP-Level=1.2, PNP-Lv=126, PNP-Nzl=6, PNP-PlacePriority=3, PNP-Pt=1, PNP-Thk=1.6, PNP-TS=70, PNP-Type=QFP, PNP-Voff=0, PNP-W=0.1, PNP-X=12, PNP-Y=12, Supplier 1=Digi-Key, Supplier 2=Mouser, Supplier 3=Arrow, Supplier Part Number 2=556-ATMEGA32U4RC-AU, Supplier Part Number 3=ATMEGA32U4RC-AU
MCU.Y.1: "8MHz ±20ppm Crystal 18pF 150 Ohms 4-SMD, No Lead", Supplier Part Number 1=1923-1256-ND, PNP-A=0, PNP-da=0, PNP-dx=0, PNP-dy=0, PNP-FeedType=Tape, PNP-Level=1, PNP-Lv=1, PNP-Nzl=4, PNP-PlacePriority=3, PNP-Pt=0, PNP-TapeIndex=2, PNP-TapeWidth=16, PNP-Thk=1.8, PNP-TS=70, PNP-Type=tr, PNP-Voff=0, PNP-W=0, PNP-X=8, PNP-Y=4.5, Supplier 1=Digi-Key, Supplier 2=Mouser, Supplier Part Number 2=449-LFXTAL055663BULK
MOS.R.3 MOS.R.4 USB.R.6 USB.R.7: library part "Res 22R 1% 0805", "Chip resistor", Supplier Part Number 1=RMCF0805FT22R0CT-ND, PNP-A=0, PNP-da=0, PNP-dx=0, PNP-dy=0, PNP-FeedType=Tape, PNP-Level=1, PNP-Lv=1, PNP-Nzl=2, PNP-PlacePriority=1, PNP-Pt=0, PNP-TapeIndex=1, PNP-TapeWidth=8, PNP-Thk=0.55, PNP-TS=70, PNP-Type=chi, PNP-Voff=0, PNP-W=0, PNP-X=2.00, PNP-Y=1.25, Supplier 1=Digi-Key, Supplier 2=Arrow, Supplier Part Number 2=RMCF0805FT22R0
MOS.U.2: "Optical Gaming Navigation Sensor", PNP-A=0, PNP-da=0, PNP-dx=0, PNP-dy=0, PNP-FeedType=Tape, PNP-Level=1.3, PNP-Lv=26, PNP-Nzl=4, PNP-PlacePriority=3, PNP-Pt=0, PNP-TapeIndex=2, PNP-TapeWidth=12, PNP-Thk=1.45, PNP-TS=70, PNP-Type=QFP, PNP-Voff=0, PNP-W=0.1, PNP-X=4.9, PNP-Y=3.9
REG.C.15: library part "Cap 100pF 100V", "0805, X5R or better", Supplier Part Number 1=1276-2426-1-ND, PNP-A=0, PNP-da=0, PNP-dx=0, PNP-dy=0, PNP-FeedType=Tape, PNP-Level=1, PNP-Lv=1, PNP-Nzl=2, PNP-PlacePriority=1, PNP-Pt=0, PNP-TapeIndex=1, PNP-TapeWidth=8, PNP-Thk=0.60, PNP-TS=70, PNP-Type=chi, PNP-Voff=0, PNP-W=0, PNP-X=2.00, PNP-Y=1.25, Supplier 1=Digi-Key, Supplier 2=Digi-Key, Supplier 3=Arrow, Supplier Part Number 2=1276-2426-2-ND, Supplier Part Number 3=L5XIfgkrxsBQF2sGZ85JNyFE59-nywaq7sHwLppiklbTEIlO4Ffw3x4_A6bjf4Mm
REG.U.3: "3.3V 150mA LDO regulator", Supplier Part Number 1=621-AP2202K-3.3TRG1, PNP-A=90, PNP-da=0, PNP-dx=0, PNP-dy=0, PNP-FeedType=Tape, PNP-Level=1, PNP-Lv=26, PNP-Nzl=2, PNP-PlacePriority=3, PNP-Pt=0, PNP-TapeIndex=1, PNP-TapeWidth=8, PNP-Thk=1, PNP-TS=90, PNP-Type=CHP, PNP-Voff=0, PNP-W=0, PNP-X=2.9, PNP-Y=1.3, Supplier 1=Mouser, Supplier 2=Digi-Key, Supplier 3=Arrow, Supplier Part Number 2=AP2202K-3.3TRG1DICT-ND, Supplier Part Number 3=PWagzdsTFFHKE_U17B45SP-NtndBrheJIaI5hB7gHD0ZVywxIBNyoAQstvnyfZZ0
REG.U.4: "Linear Voltage Regulator IC 1 Output 150mA SOT-23-5", Supplier Part Number 1=AP2204K-1.8TRG1DICT-ND, PNP-A=90, PNP-da=0, PNP-dx=0, PNP-dy=0, PNP-FeedType=Tape, PNP-Level=1, PNP-Lv=26, PNP-Nzl=2, PNP-PlacePriority=3, PNP-Pt=0, PNP-TapeIndex=1, PNP-TapeWidth=8, PNP-Thk=1, PNP-TS=90, PNP-Type=CHP, PNP-Voff=0, PNP-W=0, PNP-X=2.9, PNP-Y=1.3, Supplier 1=Digi-Key, Supplier 2=Mouser, Supplier Part Number 2=621-AP2204K-1.8TRG1
USB.FB.1 USB.FB.2 USB.FB.3: "FERRITE BEAD 600 OHM 0805 1LN", Supplier Part Number 1=535-12556-1-ND, PNP-A=0, PNP-da=0, PNP-dx=0, PNP-dy=0, PNP-FeedType=Tape, PNP-Level=1, PNP-Lv=1, PNP-Nzl=2, PNP-PlacePriority=1, PNP-Pt=0, PNP-TapeIndex=1, PNP-TapeWidth=8, PNP-Thk=0.55, PNP-TS=70, PNP-Type=chi, PNP-Voff=0, PNP-W=0, PNP-X=2.00, PNP-Y=1.25, Supplier 1=Digi-Key
USB.J.2: "USB - B USB 2.0 Receptacle Connector 4 Position Surface Mount, Right Angle", Supplier Part Number 1=A114945-ND, PNP-A=0, PNP-da=0, Supplier 1=Digi-Key, Supplier 2=Mouser, Supplier 3=Arrow, Supplier Part Number 2=571-1734346-1, Supplier Part Number 3=1734346-1
USB.R.13 USB.R.14 USB.R.15: library part "Res 0R 0805", "Chip resistor", Supplier Part Number 1=RMCF0805ZT0R00TR-ND, PNP-A=0, PNP-da=0, PNP-dx=0, PNP-dy=0, PNP-FeedType=Tape, PNP-Level=1, PNP-Lv=1, PNP-Nzl=2, PNP-PlacePriority=1, PNP-Pt=0, PNP-TapeIndex=1, PNP-TapeWidth=8, PNP-Thk=0.55, PNP-TS=70, PNP-Type=chi, PNP-Voff=0, PNP-W=0, PNP-X=2.00, PNP-Y=1.25, Supplier 1=Digi-Key
USB.Z.1: "TVS DIODE 5.5V 6TSOP (Low capacitance, USB)", PNP-A=270, PNP-da=0, PNP-dx=0, PNP-dy=0, PNP-FeedType=Tape, PNP-Level=1, PNP-Lv=26, PNP-Nzl=2, PNP-PlacePriority=3, PNP-Pt=0, PNP-TapeIndex=1, PNP-TapeWidth=8, PNP-Thk=1, PNP-TS=90, PNP-Type=CHP, PNP-Voff=0, PNP-W=0, PNP-X=2.9, PNP-Y=1.3
VPC.CJ.1 VPC.CJ.2 VPC.CJ.3 VPC.CJ.4 VPC.CJ.5 VPC.CJ.6 VPC.CJ.7 VPC.CJ.8 VPC.CJ.9: library part PCBJoint, "Pad for soldering a castellated PCB edge. Easy way to join two PCBs together.", PNP-A=0, PNP-da=0, PNP-dx=0, PNP-dy=0, PNP-FeedType=Tape, PNP-Level=1, PNP-Lv=1, PNP-Nzl=2, PNP-PlacePriority=1, PNP-Pt=0, PNP-TapeIndex=1, PNP-TapeWidth=8, PNP-Thk=1, PNP-TS=70, PNP-Type=CHI, PNP-Voff=0, PNP-W=0, PNP-X=1, PNP-Y=1
VPC.Z.2: "TVS DIODE 5.5V 6TSOP (Low capacitance, USB)", Supplier Part Number 1=1727-3578-1-ND, PNP-A=270, PNP-da=0, PNP-dx=0, PNP-dy=0, PNP-FeedType=Tape, PNP-Level=1, PNP-Lv=26, PNP-Nzl=2, PNP-PlacePriority=3, PNP-Pt=0, PNP-TapeIndex=1, PNP-TapeWidth=8, PNP-Thk=1, PNP-TS=90, PNP-Type=CHP, PNP-Voff=0, PNP-W=0, PNP-X=2.9, PNP-Y=1.3, Supplier 1=Digi-Key, Supplier 2=Mouser, Supplier 3=Arrow, Supplier Part Number 2=771-IP4220CZ6-T/R, Supplier Part Number 3=IP4220CZ6,125

## Free pads (board coordinates)
  round 0 hole 6: ""(7,58.5) ""(29,58.5)
  round 0 hole 17: ""(44.7,46.359)

## Via types
v1: diameter 1, hole 0.5, Top Layer to Bottom Layer, tented both sides, 173 vias
v2: diameter 1.016, hole 0.508, Top Layer to Bottom Layer, 28 vias

## Nets (pads, with @x,y where several pads share a name; then routed paths per layer and width w, separated by ;. In a path a pad name is that pad's centre, name@x,y a point inside that pad or via, vN(x,y) a via of type N, cw(c..) or ccw(c..) an arc to the next point about the centre after c; other vN are vias at no path point)
1V8: MOS.R.3.2 MOS.U.2.4 REG.C.17.2 REG.C.18.2 REG.U.4.5 | length 47.7
  Top Layer w0.6: MOS.R.3.2 38.3,15.302 REG.C.17.2 44.624,15.326 46.6,15.326 48.45,15.326 REG.U.4.5 48.45,18.35 54.9,24.8 54.9,35.8 53.5,37.2 45.576,37.2 44.401,36.025 MOS.U.2.4
3V3: MCU.C.5.2 MCU.C.6.2 MCU.C.7.2 MCU.C.8.2 MCU.C.9.2 MCU.R.1.2 MCU.U.1.14 MCU.U.1.24 MCU.U.1.34 MCU.U.1.44 MOS.R.5.2 MOS.U.2.5 REG.C.13.2 REG.C.14.2 REG.U.3.5 VPC.CJ.8.1 VPC.R.16.2 VPC.R.17.2 VPC.R.18.2 | length 95.7
  Top Layer w0.4: MCU.C.5.2 6.348,32.85 MCU.U.1.24 10.35,32.85 v1(10.4,32.9) ; v1(8.4,23.5) 9.85,23.5 MCU.U.1.34 ; MCU.U.1.14 16.25,36.498 17.702,37.95 MCU.C.6.2 ; MCU.U.1.44 17.85,23.5 v1(19.2,23.5) ; MOS.R.5.2 21.652,39.85 22.55,39.85 23.83,38.57 26.922,38.57 28.5,40.148 28.5,41.498 28.8,41.798 VPC.R.18.2
  Top Layer w1: v1(4.4,33.1) 4.448,33.148 MCU.C.5.2 ; MCU.C.9.2 8.348,23.448 v1(8.4,23.5) ; v1(15.5,16.9) 15.502,16.902 REG.C.13.2 21.1,16.902 v1(21.1,18.2) ; VPC.CJ.8.1 16.4,51.2 19.5,48.1 19.5,47 ; MCU.C.6.2 MCU.C.7.2@17.702,40.002 ; MCU.C.7.2 MCU.C.7.2@17.702,40.002 ; v1(19.2,23.5) 19.352,23.348 MCU.C.8.2 ; MCU.R.1.2 19.5,45.1 ; VPC.R.16.2 21.298,45.1 19.5,45.1 ; VPC.R.17.2 19.5,47 ; MOS.R.5.2 MCU.C.7.2@17.702,40.002 ; 19.5,45.1 19.5,47
  Bottom Layer w0.6: v1(21.2,35) 31.7,35 33.9,37.2 45.004,37.2 46.179,36.025 MOS.U.2.5
  other v1: 19.2,41.5
C\S\: MCU.U.1.8 MOS.U.2.13 | length 29.5
  Top Layer w0.4: MCU.U.1.8 25.15,31.25 v1(27,29.4)
  Bottom Layer w0.4: v1(27,29.4) 31.499,29.4 37.119,23.78 44.08,23.78 45.29,24.99 MOS.U.2.13
GND: LBS.C.20.1 LBS.C.21.1 LBS.SW.1.A LBS.SW.2.A MCH.SP.1.1 MCH.SP.2.1 MCH.SP.3.1 MCH.SP.4.1 MCH.SP.5.1 MCH.SP.6.1 MCH.SP.7.1 MCH.SP.8.1 MCH.SP.9.1 MCH.SP.10.1 MCH.SP.11.1 MCH.SP.12.1 MCH.SP.13.1 MCH.SP.14.1 MCH.SP.15.1 MCH.SP.16.1 MCH.SP.17.1 MCH.SP.18.1 MCH.SP.19.1 MCH.SP.20.1 MCH.SP.21.1 MCH.SP.22.1 MCH.SP.23.1 MCH.SP.24.1 MCH.SP.25.1 MCH.SP.26.1 MCH.SP.27.1 MCH.SP.28.1 MCU.C.1.1 MCU.C.2.1 MCU.C.3.1 MCU.C.4.1 MCU.C.5.1 MCU.C.6.1 MCU.C.7.1 MCU.C.8.1 MCU.C.9.1 MCU.C.22.1 MCU.D.1.2 MCU.J.1.6 MCU.U.1.5 MCU.U.1.12 MCU.U.1.15 MCU.U.1.18 MCU.U.1.21 MCU.U.1.23 MCU.U.1.26 MCU.U.1.28 MCU.U.1.30 MCU.U.1.31 MCU.U.1.32 MCU.U.1.33 MCU.U.1.35 MCU.U.1.37 MCU.U.1.38 MCU.U.1.40 MCU.U.1.43 MCU.Y.1.2 MCU.Y.1.4 MOS.C.10.1 MOS.C.11.1 MOS.U.2.8 REG.C.12.1 REG.C.13.1 REG.C.14.1 REG.C.15.1 REG.C.16.1 REG.C.17.1 REG.C.18.1 REG.U.3.2 REG.U.4.2 USB.C.19.1 USB.R.13.1 USB.R.14.1 USB.R.15.1 USB.Z.1.2 VPC.CJ.1.1 VPC.CJ.5.1 VPC.CJ.9.1 VPC.Z.2.2 | length 79.6
  Top Layer w0.4: 6.3,27.2 7.15,28.05 MCU.U.1.30 ; 10.1,37.2 10.65,36.65 MCU.U.1.21 ; v1(10.3,40.7) 11.4,40.7 13.05,39.05 MCU.U.1.18 ; MCU.C.9.1 10.65,22.148 MCU.U.1.35 ; v1(12.5,19.6) 13.6,20.7 13.6,21.3 14.65,22.35 MCU.U.1.40 ; MCU.U.1.15 15.45,37.952 MCU.C.6.1 ; MCU.U.1.43 17.05,22.148 MCU.C.8.1 ; MCU.U.1.5 22.898,28.85 23.5,28.248 MCU.C.1.1
  Top Layer w0.55: VPC.Z.2.2 v1(27.4,46) ; USB.Z.1.2 v1(58.1,41.6)
  Top Layer w0.6: v1(22.2,15.6) REG.U.3.2 22.2,13.052 22.602,12.65 REG.C.12.1 ; v1(49.4,14) REG.U.4.2 49.4,11.352 49.702,11.05 REG.C.16.1
  Top Layer w0.8: MOS.C.11.1 MOS.C.10.1
  Top Layer w0.9: MCU.C.2.1 8.55,45.225 8.575,45.2 10.4,45.2 MCU.Y.1.2 ; MCU.Y.1.4 14.75,42.35 16,43.6 16.525,43.6 16.55,43.625 MCU.C.3.1
  Top Layer w1: LBS.C.20.1 12.402,19.502 v1(12.5,19.6) ; MCU.C.6.1 15.698,39.5 16.482,39.5 ; MCU.C.8.1 17.348,21.6 18.552,20.395 MCU.C.4.1@18.552,20 ; REG.C.13.1 19.65,14.898 20.352,15.6 v1(22.2,15.6) 22.202,15.598 REG.C.15.1 ; MCU.C.4.1 MCU.C.4.1@18.552,20 ; v1(20,20) MCU.C.4.1@18.552,20 ; v1(26.8,49.8) 27.138,49.462 27.138,48 27.4,47.738 v1(27.4,46) 27.4,43.6 v1(27,43.2) ; REG.C.17.1 46.85,13.298 47.552,14 v1(49.4,14) ; v1(54.2,43.7) 56.3,41.6 v1(58.1,41.6) 60.048,41.6 60.65,40.998 USB.R.13.1
  other v1: 37,4.5 25.5,5 8,6.5 15.5,7.5 34.5,8 45.5,8 28.5,9 50,9 23.5,9.2 8,11 31.5,11.5 45.5,11.5 24.4,12.4 1.5,13 18.5,13.5 10.9,13.9 39,14 42.5,14 15.5,15 5.6,15.4 27.6,15.4 1.5,17 43,17.5 32,18 39,18 50,18 27.4,18.7 10,20 45.8,20.7 33,20.9 1.5,21 6.6,22 47.8,22.9 45,23 51.5,23 55,23 22.6,23.1 33.7,24.4 37.9,24.7 1.5,25 10.5,26.5 13.5,26.5 17,26.5 27.3,27.1 35,27.2 1.5,29 17.5,29 25.5,29 31.9,30.3 58.7,30.7 10.3,30.8 61,31 74.5,31.5 29.1,32.4 12.5,32.9 14.9,32.9 1.5,33 34.9,33 60.5,33 58.7,33.9 62,34 32.9,34.7 8,35 67,36 22.5,36.5 63.5,36.5 72.5,36.5 29.5,36.6 26.1,36.7 1.5,37 6.5,37 29.5,38.5 38.8,38.5 50.7,38.7 77.3,39.8 52.8,40.7 1.5,41 69,41.5 35.8,41.7 8.5,41.9 16.5,42 66.5,43 21,43.3 7,43.4 18.2,43.6 31.1,43.9 1.5,45 67,45.5 35,46 7,46.1 18.1,46.3 9.7,47 15.8,47 54.7,47 12.8,47.1 66,47.5 68,48.5 1.5,49 20.8,49.6 35.7,50 53.8,50.4 8.5,51 14.5,51 32,52.5 1.5,53 37.6,53.1 51.6,53.3 26.9,54.2 34.5,55 48.6,55.2 40.6,55.3 4.5,55.5 9.5,55.5 19.4,55.6 44.6,56 1.5,57 37.5,58 13,58.5 41,59.5 44.5,59.5 49,59.5 22,60 1.5,61 26,61 4.5,61.5 9.5,61.5 18.5,61.5 31.5,61.5
  other v2: 15.6,1.6 22.4,1.6 28.4,1.6 34.1,1.6 44.8,1.8 6.8,2.2 52,3.5 3.2,4.9 56.5,8 1.7,8.6 56.1,15.4 59.9,19.4 65.5,19.7 70.5,20.8 72.4,25.1 68.5,27.6 73.8,47.2 71.9,52.1 58.7,53.5 63.1,54.3 55.1,55.1 68.7,56.2 52.5,57.8 52,61.7 51,65.7 3.6,66.4 9,66.4 47,66.4
MISO: MCU.J.1.1 MCU.U.1.11 MOS.R.5.1 MOS.U.2.12 | length 42
  Top Layer w0.4: MCU.U.1.11 19.6,36.098 MOS.R.5.1 ; MCU.U.1.11@20.05,33.65 26.45,33.65 31.14,28.96 MCU.J.1.1
  Bottom Layer w0.4: MCU.J.1.1 31.2,25.1 31.6,25.1 35.2,21.5 45,21.5 47.068,23.568 MOS.U.2.12
MOSI: MCU.J.1.4 MCU.U.1.10 MOS.U.2.11 | length 53.9
  Top Layer w0.4: MCU.U.1.10 26.05,32.85 30,28.9 v1(30,28.2)
  Bottom Layer w0.4: v1(30,28.2) 26.7,28.2 24.2,25.7 24.2,22.3 25.309,21.191 27.291,21.191 MCU.J.1.4 31.32,19.78 46.68,19.78 48.846,21.946 MOS.U.2.11
NetLBS.C.20_2: LBS.C.20.2 LBS.R.11.2 MCU.U.1.29 | length 17.4
  Top Layer w0.4: MCU.U.1.29 7.05,28.85 5.52,27.32 5.52,21.457 8.977,18 LBS.C.20.2 LBS.C.20.2@10.398,17.65
  Top Layer w1: LBS.R.11.2 LBS.C.20.2@10.398,17.65
NetLBS.C.21_2: LBS.C.21.2 LBS.R.12.2 MCU.U.1.27 | length 18.3
  Top Layer w0.4: LBS.C.21.2 7.588,17.014 7.588,18.512 4.9,21.2 4.9,28.2 7.15,30.45 MCU.U.1.27
  Top Layer w1: LBS.R.12.2 7.602,15.202 LBS.C.21.2
NetLBS.R.11_1: LBS.R.11.1 LBS.SW.1.B | length 36.3
  Top Layer w0.4: LBS.R.11.1 12.402,16.25 12.702,16.55 12.952,16.55 14.702,18.3 19.899,18.3 20.719,19.12 22.1,19.12 22.698,18.522 26.166,18.522 26.4,18.288 26.4,14.901 31.101,10.2 38.7,10.2 40.1,11.6 LBS.SW.1.B
NetLBS.R.12_1: LBS.R.12.1 LBS.SW.2.B | length 4.8
  Top Layer w1: LBS.R.12.1 8.898,13.198 8.9,13.2 9.5,13.2 10.9,11.8 LBS.SW.2.B
NetMCU.C.1_2: MCU.C.1.2 MCU.U.1.6 | length 4.4
  Top Layer w0.4: MCU.U.1.6 21.524,29.65 22.126,30.252 MCU.C.1.2
NetMCU.C.2_2: MCU.C.2.2 MCU.U.1.17 MCU.Y.1.3 | length 11
  Top Layer w0.4: MCU.Y.1.3 10.85,42.35 13.85,39.35 MCU.U.1.17
  Top Layer w0.6: MCU.C.2.2 8.55,43.625 9.425,42.75 10.05,42.75 MCU.Y.1.3
NetMCU.C.3_2: MCU.C.3.2 MCU.U.1.16 MCU.Y.1.1 | length 13
  Top Layer w0.4: MCU.U.1.16 14.65,39.55 13.1,41.1 13.1,43.6 14.099,44.599 14.099,44.656 14.593,45.15 MCU.Y.1.1
  Top Layer w0.6: MCU.Y.1.1 14.7,45.2 16.5,45.2 MCU.C.3.2
NetMCU.C.4_2: MCU.C.4.2 MCU.U.1.42 | length 4.2
  Top Layer w0.4: MCU.U.1.42 16.25,20.148 MCU.C.4.2
NetMCU.D.1_1: MCU.D.1.1 MCU.R.2.1 | length 2.7
  Top Layer w1: MCU.R.2.1 18.85,9.498 18.95,9.398 MCU.D.1.1@18.95,9.2
NetMCU.R.2_2: MCU.R.2.2 MCU.U.1.36 | length 15.7
  Top Layer w0.4: MCU.U.1.36 11.45,14.95 11.8,14.6 13.9,14.6 16.5,12 MCU.R.2.2 MCU.R.2.2@16.5,11.5
NetMCU.U.1_1: MCU.U.1.1 VPC.R.10.2 | length 27
  Top Layer w0.4: MCU.U.1.1 20.15,25.65 v1(21.5,24.3) ; VPC.R.10.2 25.302,42.75 26.1,41.952 v1(26.1,39.5)
  Bottom Layer w0.4: v1(21.5,24.3) 21.5,26.699 20.98,27.219 20.98,33 20,33.98 20,37.4 21.8,39.2 25.1,39.2 25.285,39.385 25.985,39.385 v1(26.1,39.5)
NetMCU.U.1_3: MCU.U.1.3 USB.R.6.2 | length 64.8
  Top Layer w0.4: MCU.U.1.3 20.75,27.25 21.5,26.5 v1(22.8,26.5) ; v1(57.8,51.7) 57.962,51.7 58.46,51.202 USB.R.6.2
  Plane 1 w0.4: v1(22.8,26.5) 23.15,26.85 23.15,27.951 33,37.801 33,50.9 39.3,57.2 49.7,57.2 55.22,51.68 57.78,51.68 v1(57.8,51.7)
NetMCU.U.1_4: MCU.U.1.4 USB.R.7.2 | length 62.1
  Top Layer w0.4: MCU.U.1.4 21.45,28.05 v1(21.9,27.6) ; v1(55.8,52.6) 55.8,51.048 56.798,50.05 USB.R.7.2
  Plane 1 w0.4: v1(21.9,27.6) 21.9,27.691 32.3,38.091 32.3,51.19 39.01,57.9 49.99,57.9 55.295,52.595 55.795,52.595 v1(55.8,52.6)
NetMCU.U.1_19: MCU.U.1.19 MOS.U.2.9 | length 60
  Top Layer w0.4: v1@11.421,38.379 12.25,37.55 MCU.U.1.19
  Bottom Layer w0.4: v1(11.421,38.38) 14.828,34.973 15.128,34.973 19.6,30.501 19.6,24.799 23.199,21.2 24.101,21.2 25.201,20.1 27.6,20.1 28.7,19 49.1,19 52.42,22.32 MOS.U.2.9@52.42,25.225
NetMCU.U.1_20: MCU.U.1.20 VPC.R.8.2 | length 21.4
  Top Layer w0.4: v1(9.2,39.3) 11.45,37.05 MCU.U.1.20 ; v1(23.6,41) VPC.R.8.2
  Bottom Layer w0.4: v1(9.2,39.3) 20.8,39.3 22.5,41 v1(23.6,41)
NetMCU.U.1_25: MCU.U.1.25 VPC.R.9.2 | length 42.6
  Top Layer w0.4: v1(5.4,31.4) 6.05,32.05 MCU.U.1.25 ; VPC.R.9.2 23.598,50.598 v1(23.9,50.9)
  Bottom Layer w0.4: v1(5.4,31.4) 5.4,38.6 4,40 4,46.777 6.623,49.4 6.686,49.4 6.726,49.44 15.64,49.44 17.1,50.9 v1(23.9,50.9)
NetMCU.U.1_39: MCU.U.1.39 VPC.CJ.4.1 VPC.Z.2.6 | length 76.3
  Top Layer w0.4: v1(12.4,21.7) 13,21.7 13.85,22.55 MCU.U.1.39
  Top Layer w0.5: VPC.Z.2.6 28.7,47.1 28.7,52.7 33,57 33,63.274 32.4,63.874 VPC.CJ.4.1
  Bottom Layer w0.4: v1(12.4,21.7) 12.4,31.1 11.5,32 11.5,34.423 4.62,41.303 4.62,46.52 6.78,48.68 6.843,48.68 6.983,48.82 20.279,48.82 20.419,48.68 21.181,48.68 21.321,48.82 27.121,48.82 27.4,49.099 28.399,49.099 v1(28.5,49.2)
NetMCU.U.1_41: MCU.U.1.41 VPC.CJ.3.1 VPC.Z.2.5 | length 80.1
  Top Layer w0.4: v1(14.9,21) 14.9,21.5 15.45,22.05 MCU.U.1.41
  Top Layer w0.5: VPC.Z.2.5 29.5,46 30,46.5 30,52.982 33.72,56.702 33.72,59.32 36.4,62 VPC.CJ.3.1
  Bottom Layer w0.4: v1(14.9,21) 14.9,27.8 13.7,29 13.7,33.1 5.24,41.56 5.24,46.2 7.24,48.2 20.022,48.2 20.162,48.06 21.438,48.06 21.578,48.2 v1(29.7,48.2)
NetMOS.C.10_2: MOS.C.10.2 MOS.C.11.2 MOS.U.2.3 | length 13.2
  Top Layer w0.7: MOS.C.11.2 33.002,36.65 33.652,37.3 34.6,37.3 ; MOS.C.10.2 33.002,38.15 33.252,38.4 33.5,38.4 34.6,37.3 ; MOS.U.2.3 42.623,36.025 41.348,37.3 34.6,37.3
NetMOS.R.3_1: MOS.R.3.1 MOS.R.4.2 | length 2
  Top Layer w1: MOS.R.4.2 34.65,11.398 MOS.R.3.1
NetMOS.R.4_1: MOS.R.4.1 MOS.U.2.15 | length 16.4
  Top Layer w1: MOS.R.4.1 34.4,13.7 37.2,16.5 39.9,16.5 41.734,18.334 MOS.U.2.15
NetREG.C.15_2: REG.C.15.2 REG.U.3.4 | length 2.1
  Top Layer w1: REG.U.3.4 23.802,17.602 REG.C.15.2
NetUSB.FB.1_1: USB.FB.1.1 USB.J.2.1 USB.Z.1.4 USB.Z.1.5 | length 21.5
  Top Layer w0.7: USB.Z.1.5 USB.Z.1.4 USB.Z.1.4@59.05,43.225 ; v1(58.5,44.4) 58.5,43.775 USB.Z.1.4@59.05,43.225 ; USB.J.2.1 65.116,41.532 62.548,44.1 59.925,44.1 USB.Z.1.4@59.05,43.225
  Top Layer w1: USB.FB.1.1 58.502,36.202 v1(58.6,36.3)
  Bottom Layer w1: v1(58.5,44.4) 60.5,42.4 60.5,38.175 59.473,37.147 59.447,37.147 v1(58.6,36.3)
NetUSB.FB.2_1: USB.FB.2.1 USB.J.2.2 USB.Z.1.3 | length 17.3
  Top Layer w0.65: USB.Z.1.3 USB.Z.1.3@59.05,39.95 ; v1(59.1,38.5) 59.05,38.55 USB.Z.1.3@59.05,39.95 ; USB.FB.2.1 62.398,45.598 v1(62.4,45.6) ; USB.J.2.2 62.3,39.9 59.1,39.9 USB.Z.1.3@59.05,39.95
  Plane 1 w0.65: v1(59.1,38.5) 59.145,38.545 59.145,42.345 v1(62.4,45.6)
NetUSB.FB.2_2: USB.FB.2.2 USB.R.6.1 | length 1.6
  Top Layer w0.65: USB.FB.2.2 USB.R.6.1
NetUSB.FB.3_1: USB.FB.3.1 USB.J.2.3 USB.Z.1.1 | length 18.5
  Top Layer w0.65: v1(56.9,45) 57.898,45.998 USB.FB.3.1 ; USB.Z.1.1 v1(57.15,38.05) 57.745,37.455 60.055,37.455 60.6,38 USB.J.2.3
  Plane 1 w0.65: v1(56.9,45) 56.9,38.3 v1(57.15,38.05)
NetUSB.FB.3_2: USB.FB.3.2 USB.R.7.1 | length 1.9
  Top Layer w0.65: USB.FB.3.2 58.701,48.104 58.701,49.699 USB.R.7.1
NetUSB.J.2_4: USB.J.2.4 USB.R.13.2 | length 5.1
  Top Layer w0.65: USB.R.13.2 61.198,43.002 62.4,41.8 62.4,41.2 USB.J.2.4
NetUSB.J.2_5: USB.J.2.5 USB.R.14.2 USB.R.15.2 | length 27.5
  Top Layer w1: USB.R.15.2 63.687,31.621 67.655,31.621 USB.J.2.5@68.285,30.991 ; USB.R.14.2 69.29,46.464 71.754,44 USB.J.2.5@72.8,44
  Top Layer w2: USB.J.2.5@68.285,30.991 68.976,30.3 69.2,30.3 74.5,35.6 74.5,42.3 74.343,42.457 74.343,42.764 73.107,44 USB.J.2.5@72.8,44
NetVPC.CJ.2_1: VPC.CJ.2.1 VPC.R.8.1 VPC.R.18.1 VPC.Z.2.4 | length 30.1
  Top Layer w0.5: VPC.R.8.1 27.352,41.25 27.352,42.077 28.4,43.124 28.4,43.552 28.65,43.802 VPC.R.18.1 28.875,43.827 28.875,45.025 VPC.Z.2.4 VPC.Z.2.4@28.95,45.05 ; VPC.Z.2.4@28.975,45.025 VPC.Z.2.4@28.95,45.05 ; VPC.CJ.2.1 40.4,64.05 34.5,58.15 34.5,56.464 30.8,52.764 30.8,46.282 29.568,45.05 VPC.Z.2.4@28.95,45.05
NetVPC.CJ.6_1: VPC.CJ.6.1 VPC.R.9.1 VPC.R.17.1 VPC.Z.2.1 | length 21.1
  Top Layer w0.5: VPC.R.17.1 23.327,46.975 VPC.Z.2.1@25.652,46.975 ; VPC.CJ.6.1 24.4,53.5 25.3,52.6 25.3,49.102 25.402,49 25.652,48.75 VPC.Z.2.1@25.652,46.975 ; VPC.Z.2.1 25.925,46.975 VPC.Z.2.1@25.652,46.975
NetVPC.CJ.7_1: VPC.CJ.7.1 VPC.R.10.1 VPC.R.16.1 VPC.Z.2.3 | length 26.6
  Top Layer w0.5: VPC.CJ.7.1 20.4,64.05 23.1,61.35 23.1,52.4 22.3,51.6 22.3,45.7 23,45 VPC.R.16.1 ; VPC.R.10.1 23.3,43.002 23.3,44.998 VPC.R.16.1 ; VPC.Z.2.3 25.925,45.075 23.377,45.075 VPC.R.16.1
R\E\S\E\T\: MCU.C.22.2 MCU.J.1.5 MCU.R.1.1 MCU.U.1.13 MOS.U.2.7 | length 56.8
  Top Layer w0.4: MCU.U.1.13 17.05,36.25 17.7,36.9 18.402,36.9 MCU.R.1.1
  Top Layer w0.5: MCU.R.1.1 19.5,38.3 20.168,38.968 22.485,38.968 23.552,37.9 27.2,37.9 29.498,40.198 MCU.C.22.2
  Top Layer w0.6: MCU.C.22.2 34.602,40.198 v1(35.75,39.05)
  Plane 1 w0.6: MCU.J.1.5 26.129,25.109 26.129,27.629 26.7,28.2 27.9,28.2 35.75,36.05 v1(35.75,39.05) 37.6,37.2 48.56,37.2 49.735,36.025 MOS.U.2.7
SCLK: MCU.J.1.3 MCU.U.1.9 MOS.U.2.10 | length 42
  Top Layer w0.4: MCU.U.1.9 25.75,32.05 28.6,29.2 MCU.J.1.3
  Plane 1 w0.4: MCU.J.1.3 28.6,25.6 30.1,27.1 32.4,27.1 37.6,21.9 48.8,21.9 50.624,23.724 MOS.U.2.10
V_USB: MCU.J.1.2 MCU.U.1.2 MCU.U.1.7 REG.C.12.2 REG.C.16.2 REG.U.3.1 REG.U.3.3 REG.U.4.1 REG.U.4.3 USB.C.19.2 USB.FB.1.2 | length 128.1
  Top Layer w0.4: v1@17.4,31.2 17.8,31.2 18.55,30.45 MCU.U.1.7 ; MCU.U.1.2 20.673,26.45 24.3,22.823 v1(24.3,19.7) ; MCU.J.1.2@31.14,21.88 MCU.J.1.2
  Top Layer w0.6: REG.C.12.2@20.598,11.802 REG.C.12.2 20.598,12.65 21.25,13.302 REG.U.3.1 ; REG.U.3.3 25.75,14.25 29.08,10.92 ; REG.C.16.2 47.898,11 47.898,11.898 48.45,12.45 REG.U.4.1 ; REG.U.4.3@50.35,12.45 REG.U.4.3 51.95,12.65 52.1,12.8
  Top Layer w1: REG.C.12.2@20.598,11.802 21.48,10.92 29.08,10.92 33.6,6.4 49.4,6.4 ; REG.C.16.2 47.698,8.102 49.4,6.4 ; USB.FB.1.2 56.698,34.198 USB.C.19.2 56.698,21.898 52.1,17.3 52.1,12.8 52.1,9.1 49.4,6.4
  Plane 1 w1: v1(24.3,19.7) 24.72,20.12 28.76,20.12 MCU.J.1.2
  Bottom Layer w0.4: v1(17.5,31.3) 18.5,30.3 18.5,24.419 18.1,24.019 18.1,22.8 19.6,21.3 22,21.3 23.6,19.7 v1(24.3,19.7)
  Bottom Layer w1: v1(24.3,19.7) 24.3,15.1 v1(27.9,11.5)
pads on no net: LBS.SW.1. LBS.SW.2. MCH.FID.1.1 MCH.FID.2.1 MCU.U.1.22 MOS.U.2. MOS.U.2.1 MOS.U.2.2 MOS.U.2.6 MOS.U.2.14 MOS.U.2.16 REG.U.4.4 USB.J.2. USB.Z.1.6

## Polygon pours and split planes (outlines as drawn)
GND on Plane 1 "Plane 1-GND" (solid, remove dead copper, pour order 16): -1,68 81,68 81,0 -1,0
3V3 on Plane 1 "Plane 1-3V3" (solid, pour order 0): 3,21.5 3,34 6,36.5 11,36.5 12.5,38 17.5,43 20,43 22,41 22,17.5 20.3,15.8 8.7,15.8
GND on Top Layer "Top Layer-GND" (solid, remove dead copper, pour order 12): -1,68 81,68 81,0 -1,0
no net on Top Layer "Top Layer-No Net" (solid, pour order 18): 13.348,21.85
3V3 on Top Layer "Top Layer-3V3" (solid, pour order 10): 18.5,20.5
GND on Plane 2 "Plane 2-GND" (solid, remove dead copper, pour order 2): -1,68 81,68 81,0 -1,0
GND on Bottom Layer "Bottom Layer-GND" (solid, remove dead copper, pour order 14): -1,68 81,68 81,0 -1,0

## Silkscreen, mask and mechanical layers (free items; w line width, h text height)
Top Overlay:
  text "R1.004" at 57.9,26.7 h2.4
  text "Licensed under the / CERN OHL v. 1.2 / Copyright Ploopy  / 2019" at 57.2,21.1 h1.6
Mechanical 1:
  lines w0.1: 36.26,26.268 36.26,34.868 53.52,34.868 53.52,26.268 36.26,26.268
Board Outline:
  drawing of 349 lines, arcs and shapes, not listed

## Text inside footprints (layer, text, board x,y; h text height)
MOS.U.2: Top Overlay "Optic Side" at 34,26.2 h2 r90; Bottom Overlay "Sensor Side" at 54.217,26.125 h2 r270; Bottom Overlay "1" at 34.3,35.9 h4